# Altium PCB CH565W-R0-1v1.PcbDoc (part 1 of 4)
Units mil, origin at the board's own origin, x right, y up, seen from the top; angles counter-clockwise.
Board outline 3947.04 x 3947.04 mil, 4 copper layers (Top Layer, Layer 1, Layer 2, Bottom Layer), stack 23.756 mil thick; 204 components, 168 nets, 932 pads, 1005 vias.
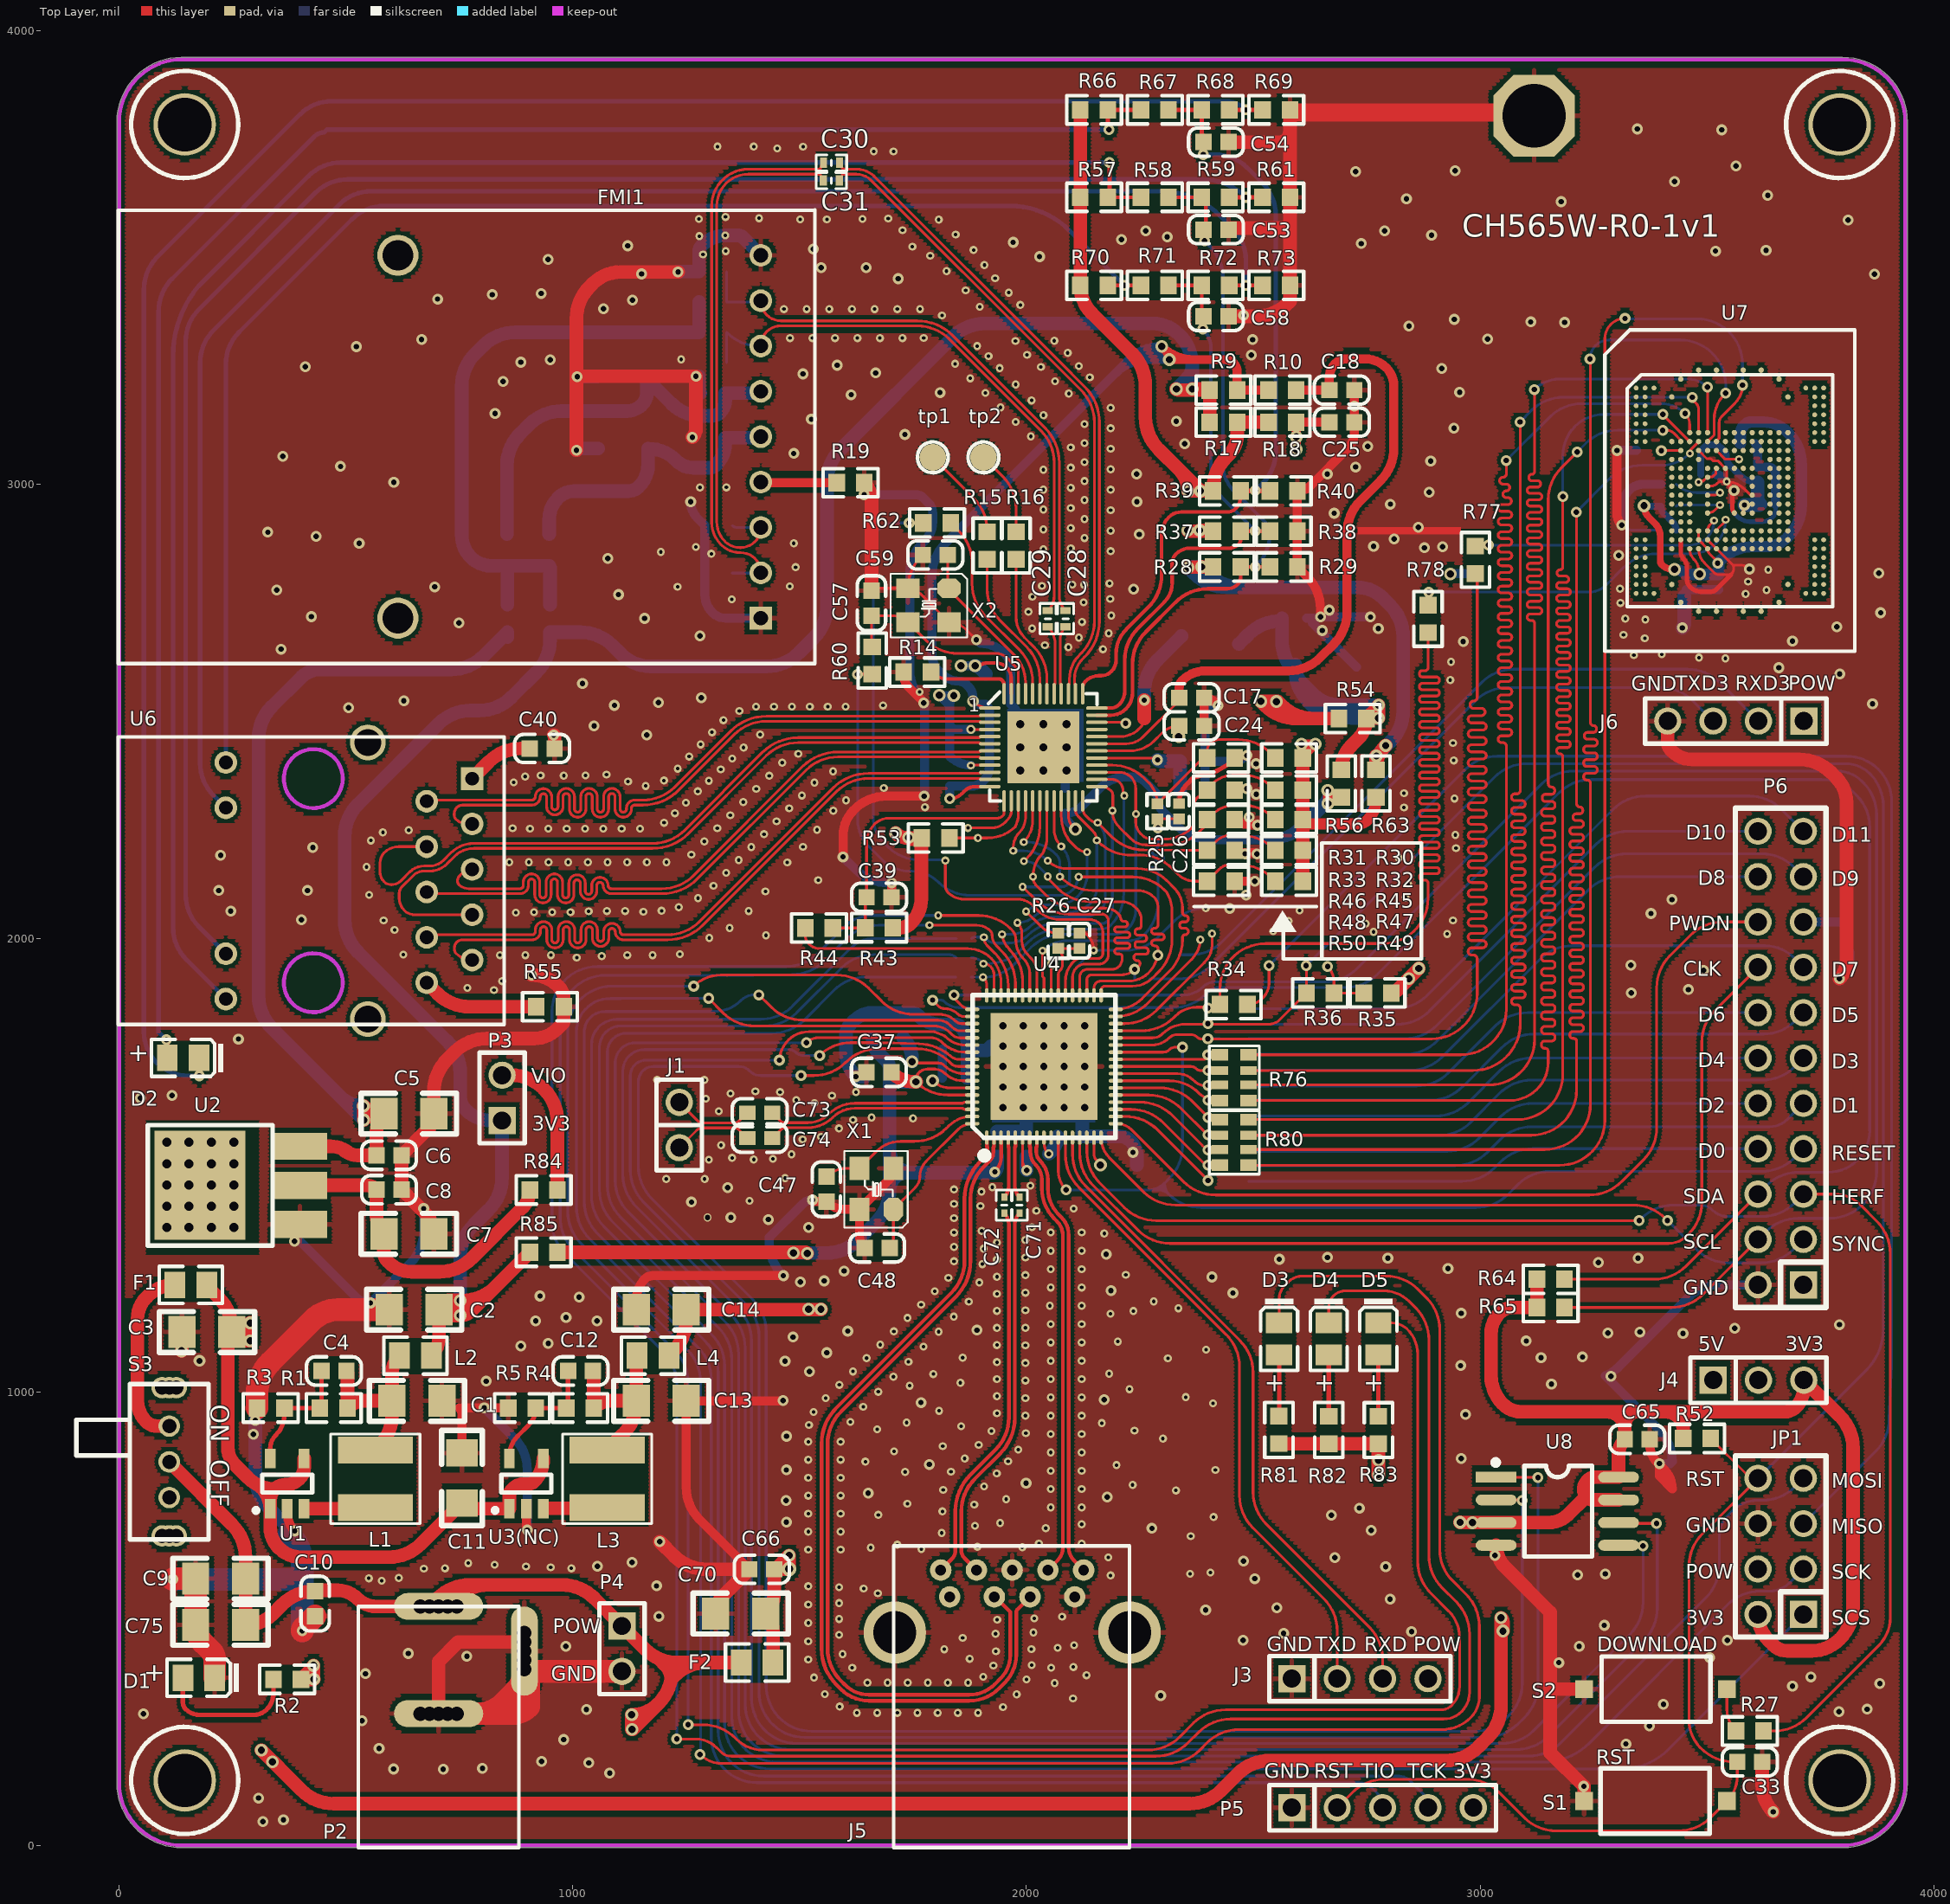
[diagram p0: Top Layer view]
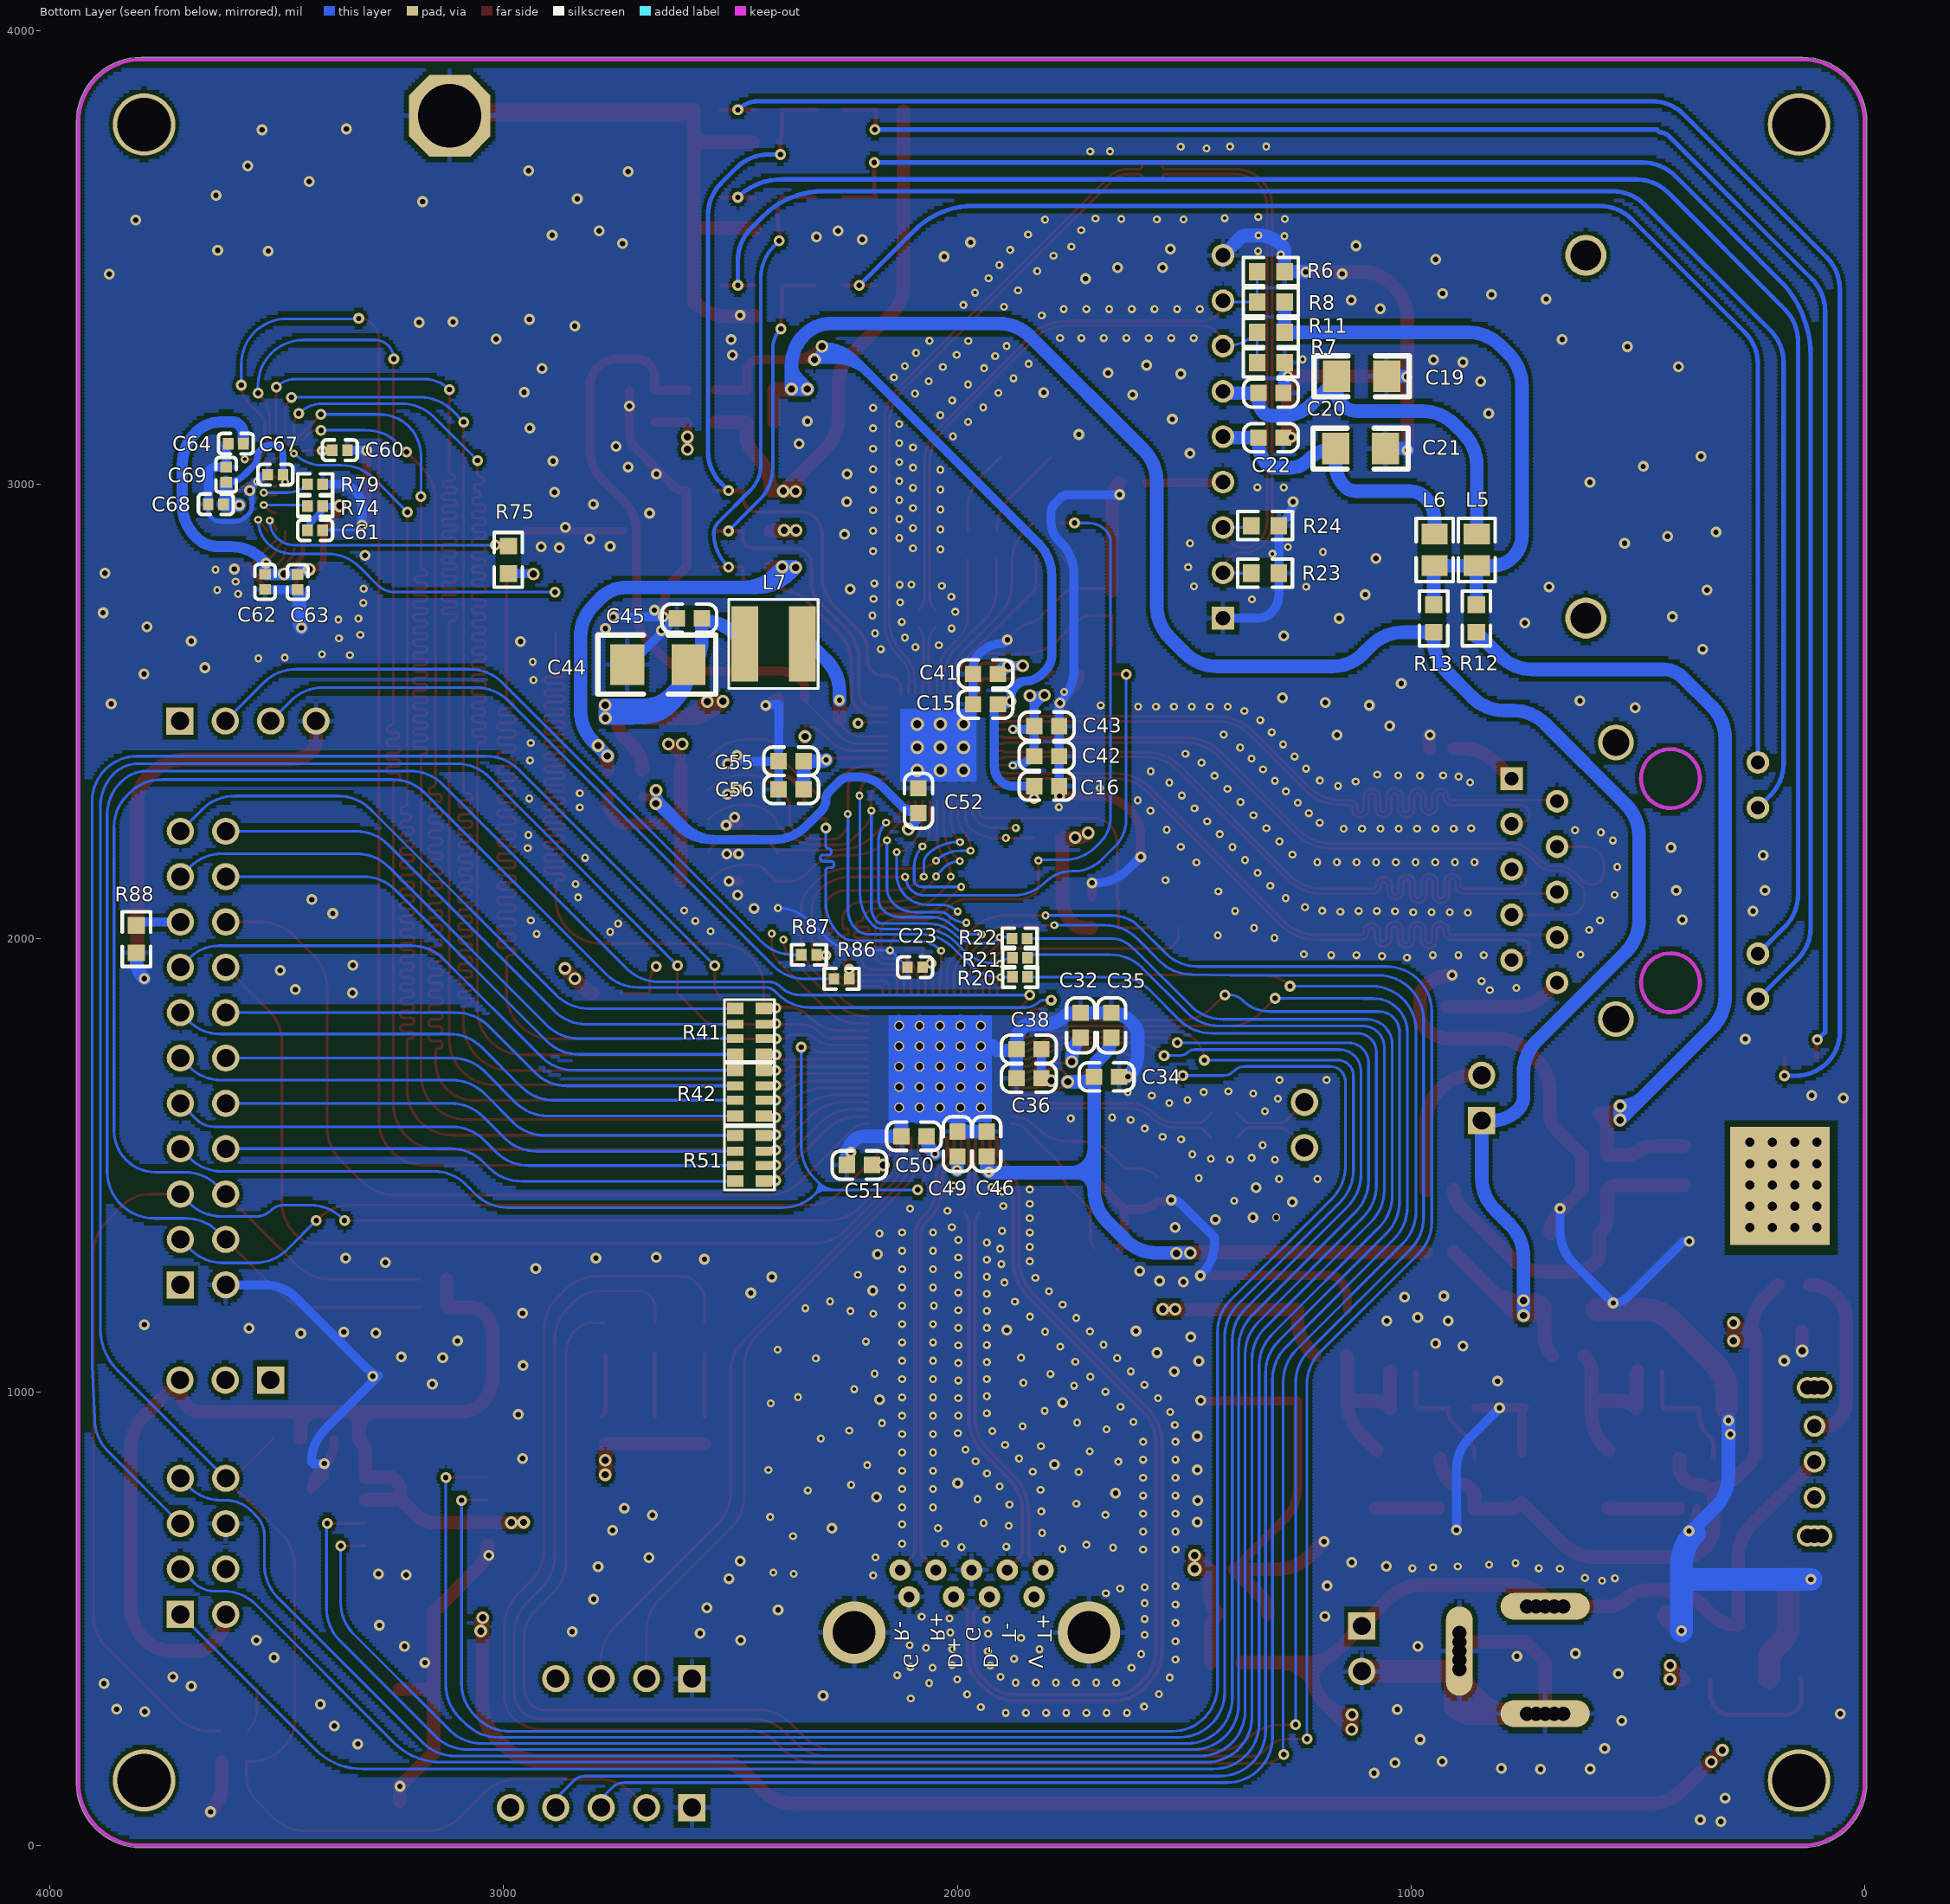
[diagram p1: Bottom Layer view, seen from below]
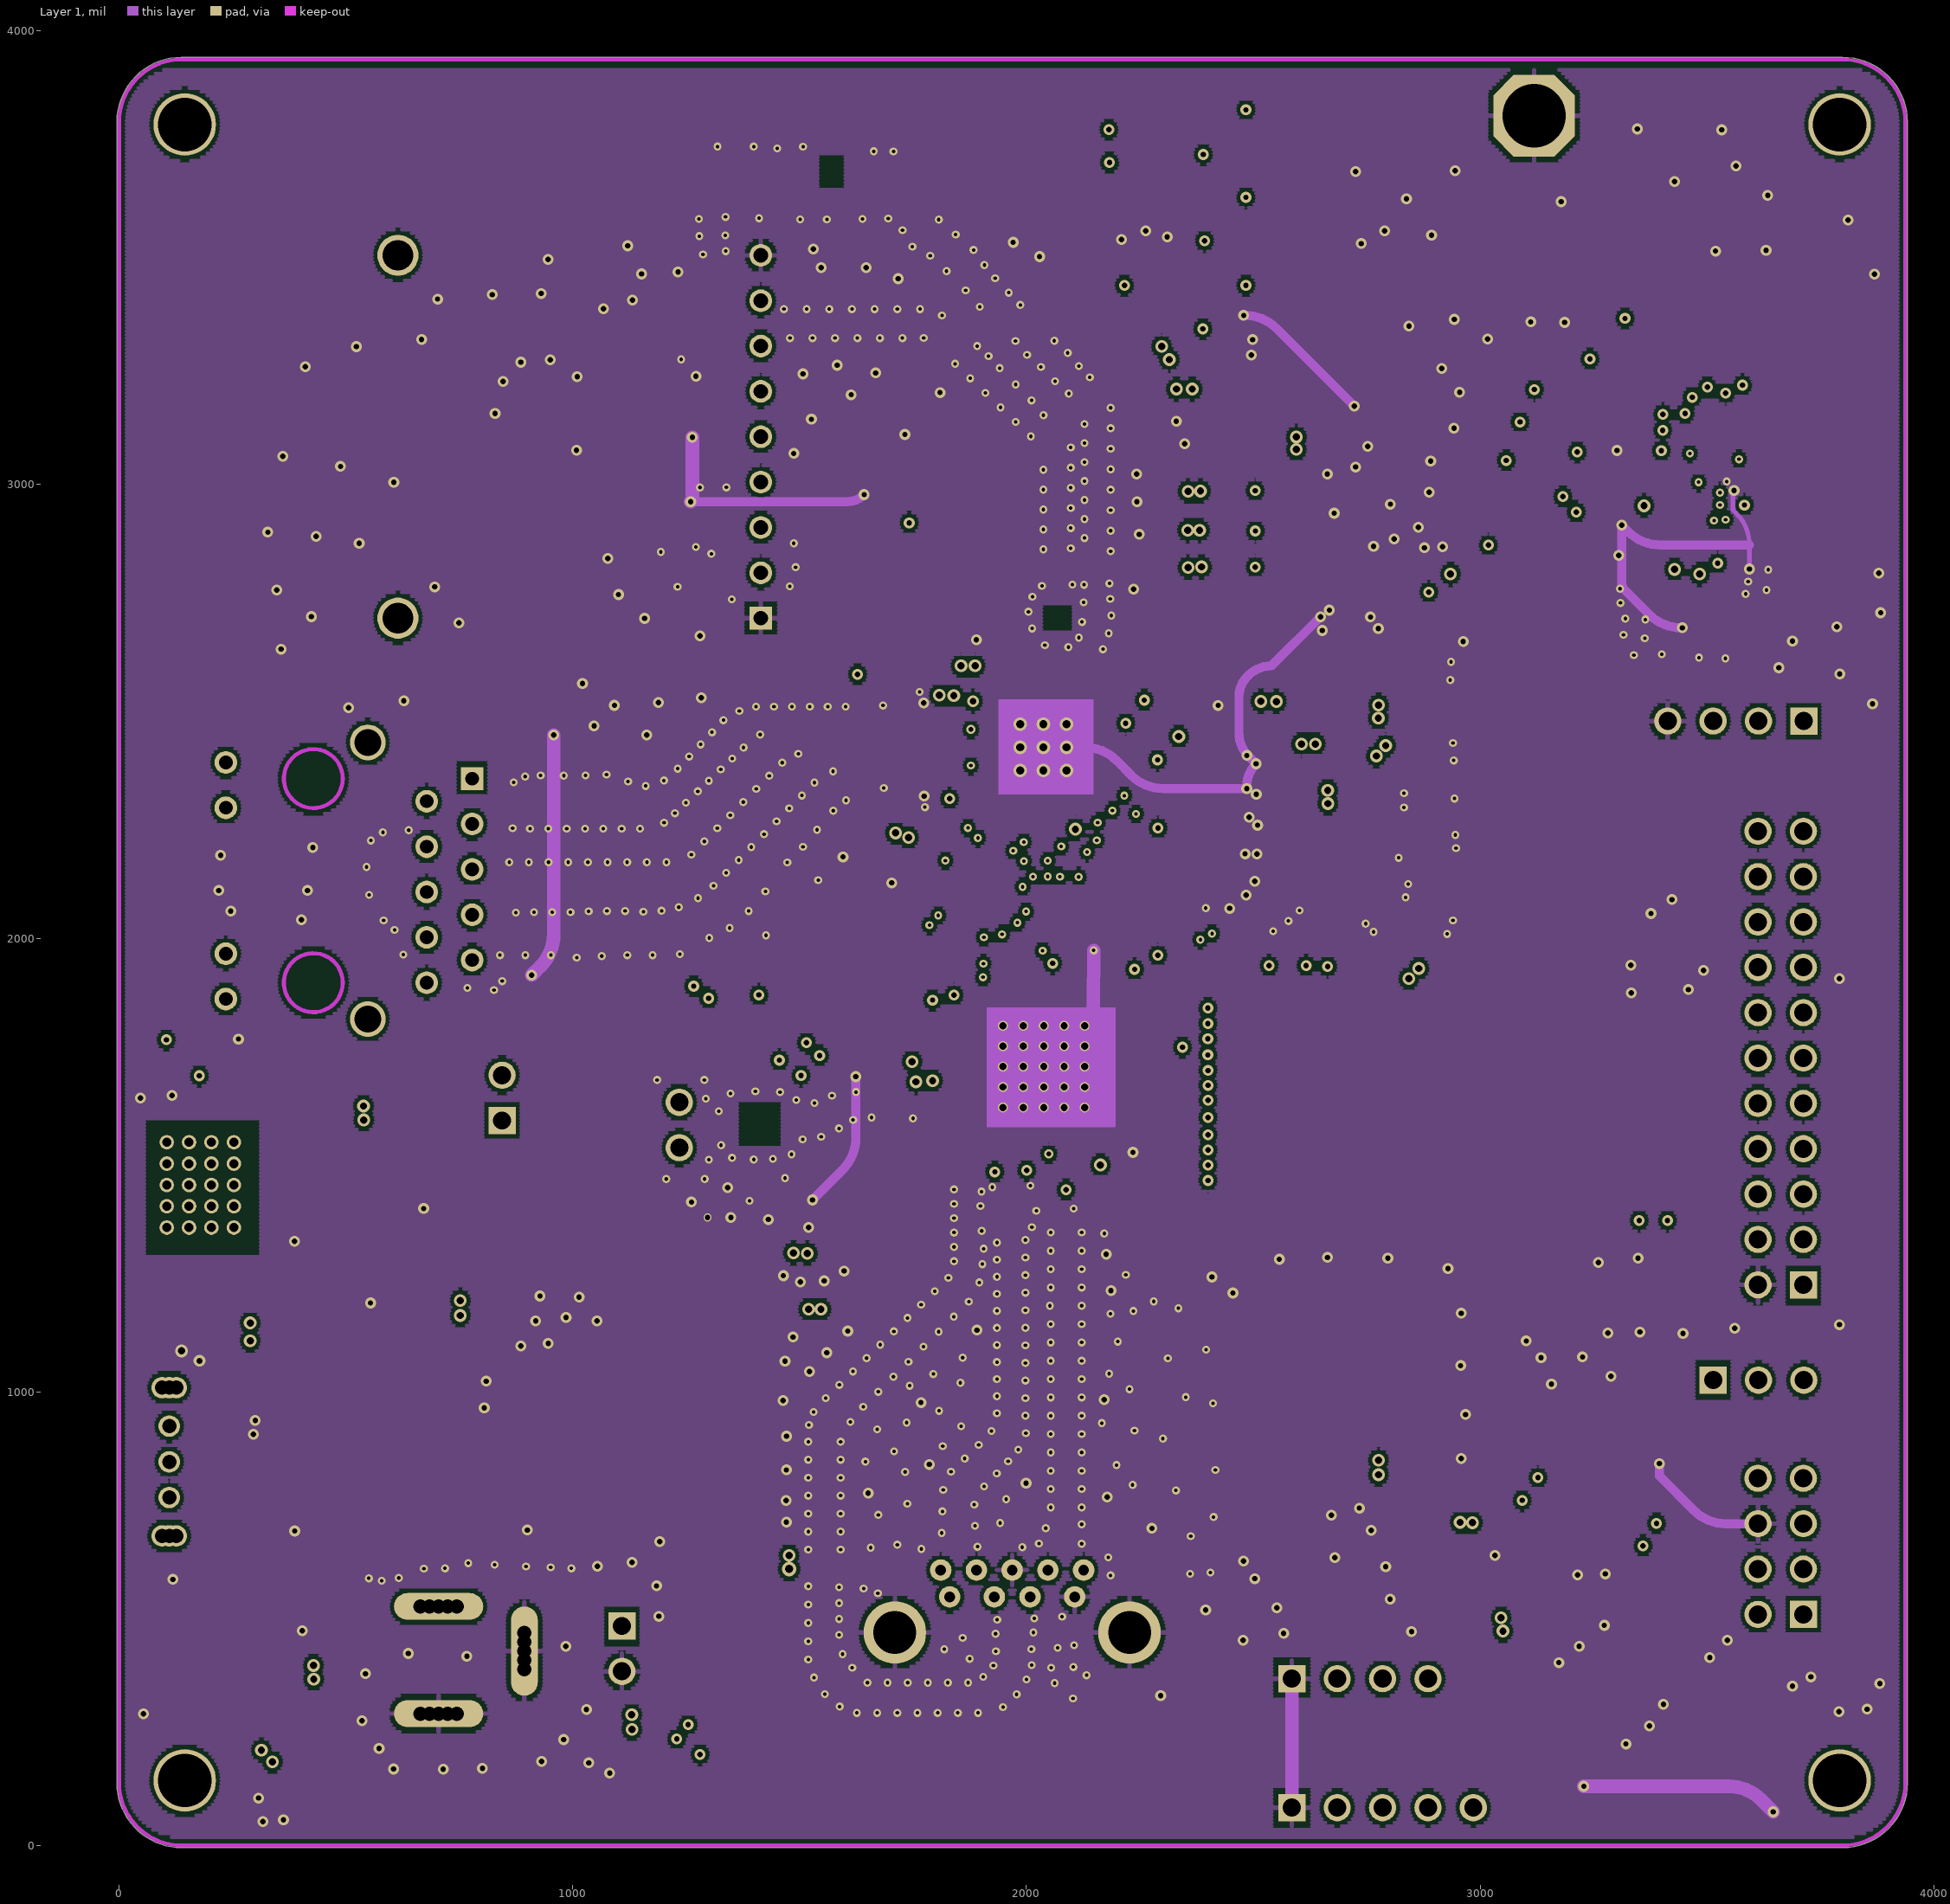
[diagram p2: Layer 1]
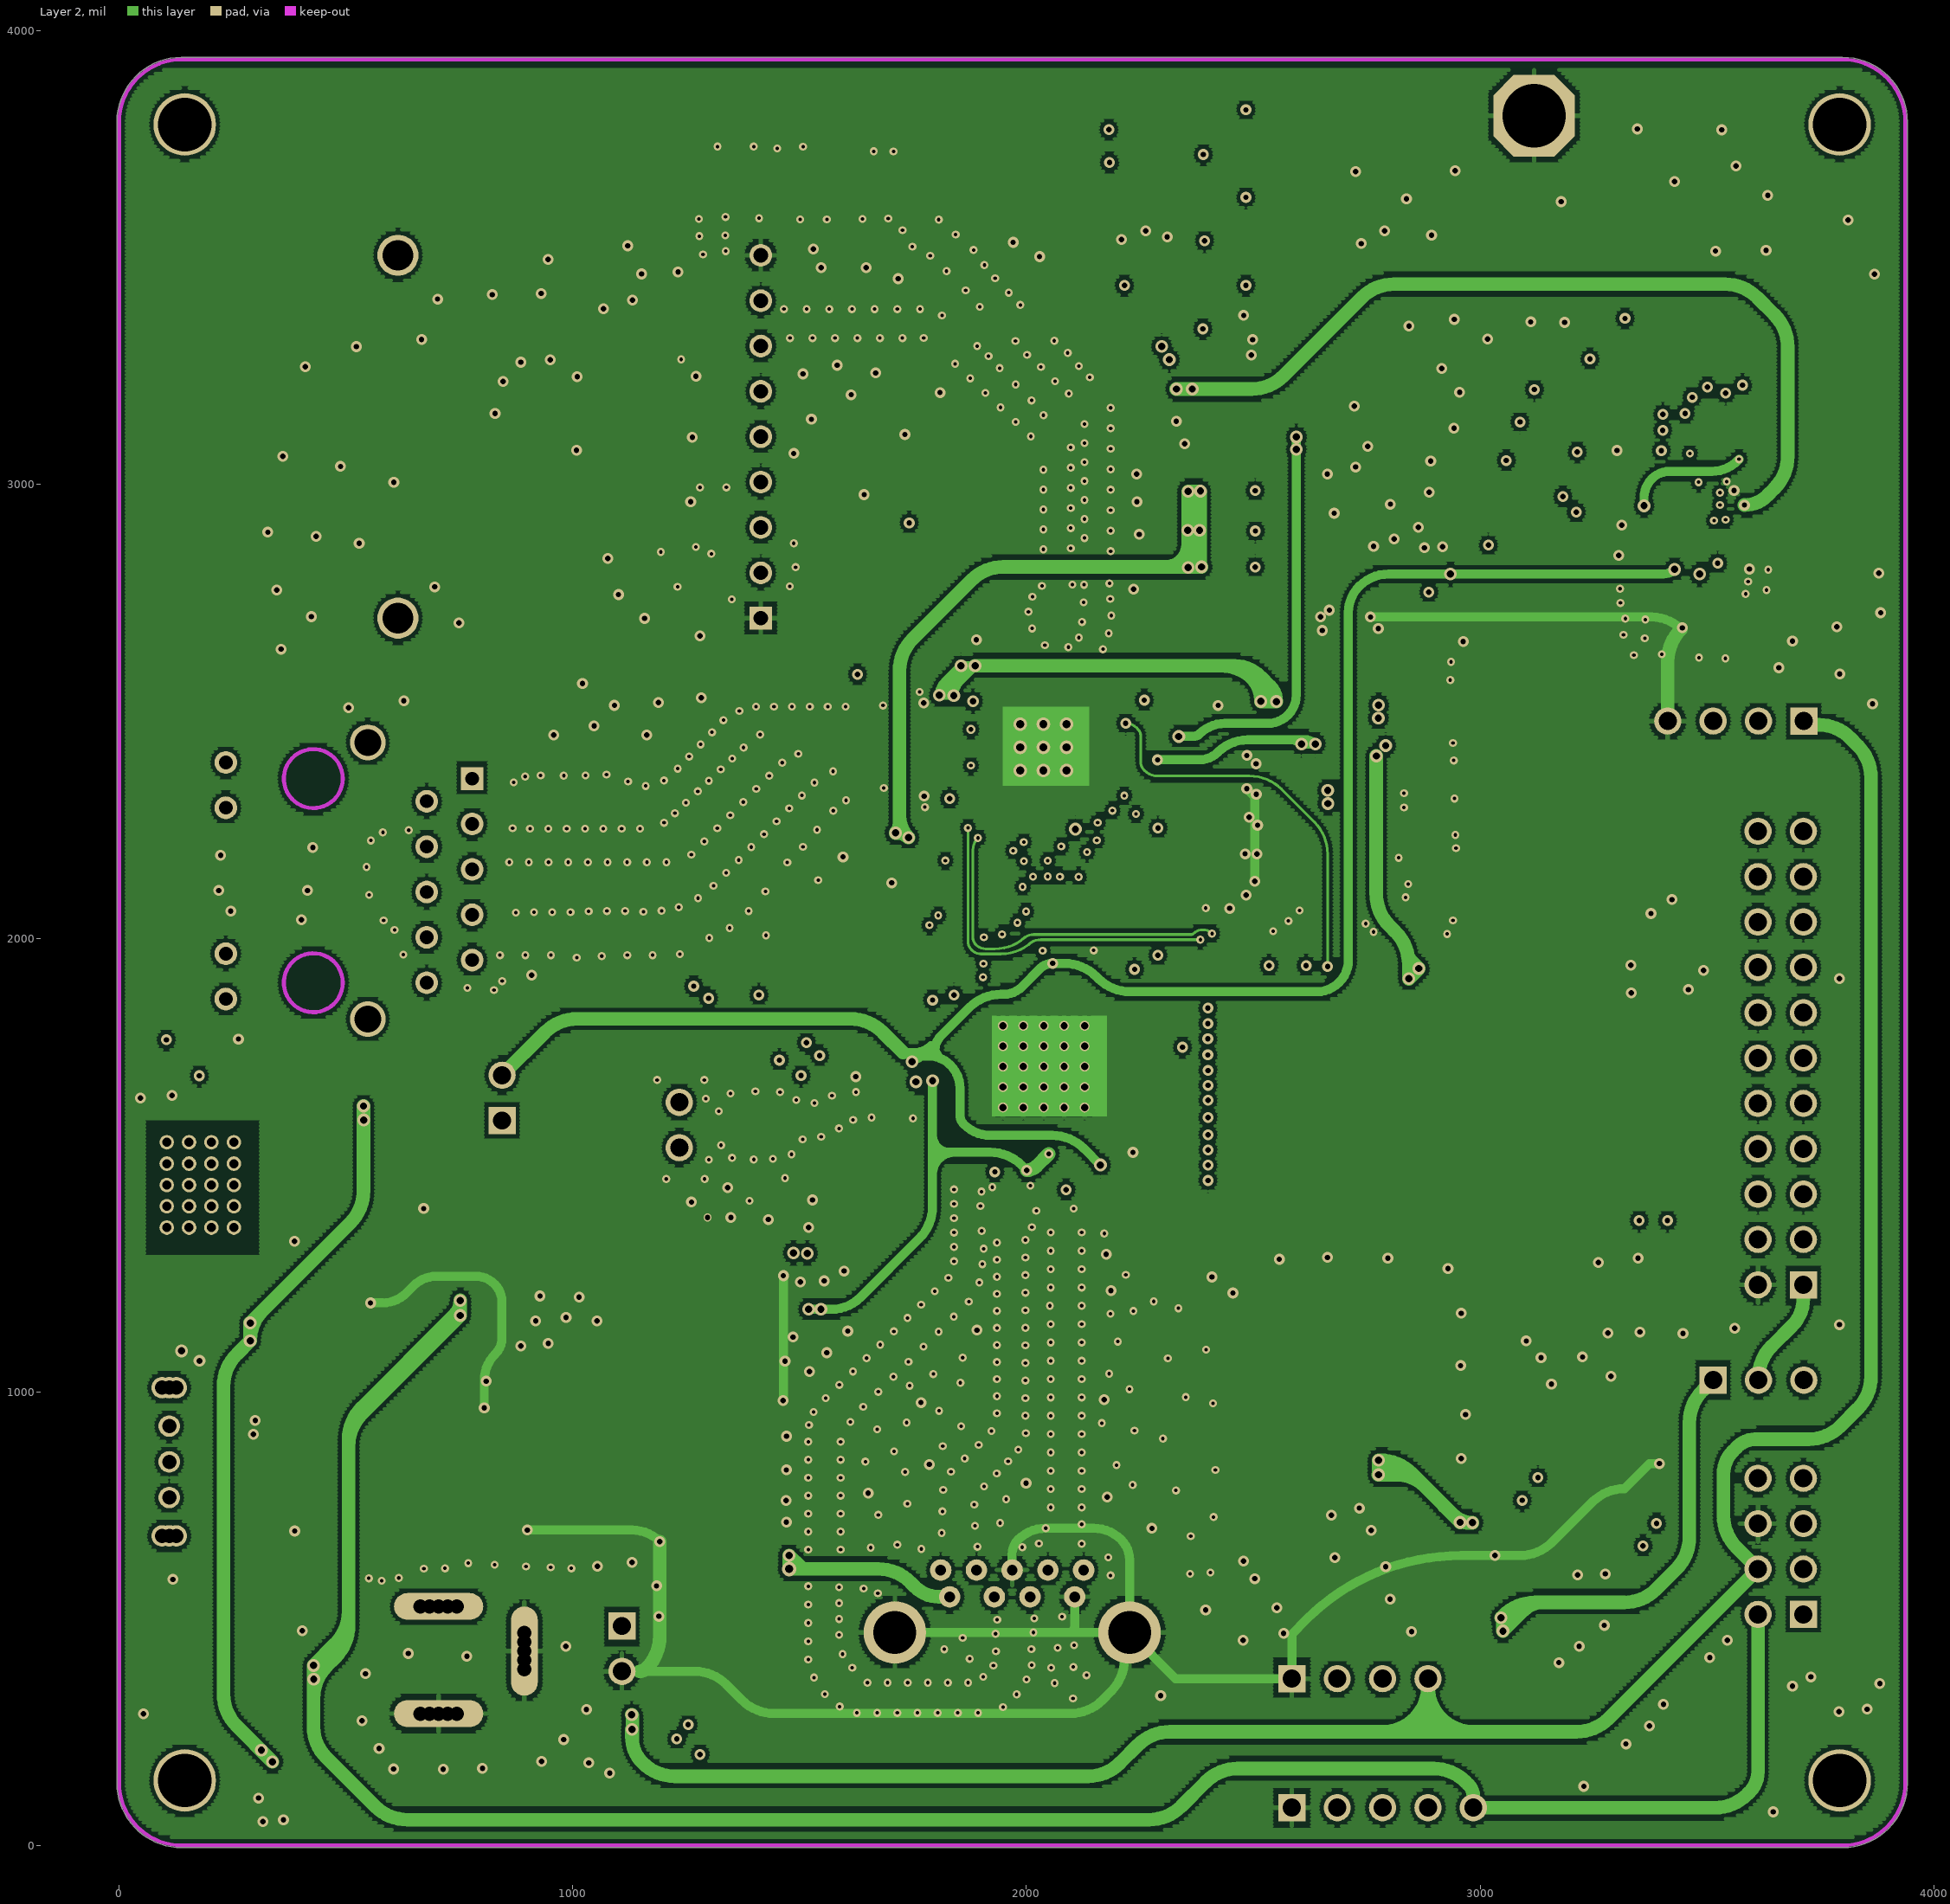
[diagram p3: Layer 2]

## Layer stack, top to bottom
Top Solder: solder mask 0.4, Solder Resist, Dk 3.5
Top Layer: signal copper 1.4
Dielectric 2: prepreg 2.8, PP-006, Dk 4.1
Layer 1: signal copper 1.378
Dielectric 3: prepreg 2.8, PP-006, Dk 4.1
Layer 2: signal copper 1.378
Dielectric 1: dielectric 12.6, FR-4, Dk 4.8
Bottom Layer: signal copper 1.4
Bottom Solder: solder mask 0.4, Solder Resist, Dk 3.5

## Board outline
-5.02,137.56 cw(c0,137.56) -5.01,137.68 cw(c0,137.8) -5.02,137.8 -5.02,3799.21 cw(c0,3799.21) -5.01,3799.38 cw(c0,3799.54) -5.02,3799.55 cw(c137.63,3799.38) 136.8,3942.02 cw(c137.63,3799.38) 136.97,3942.02 cw(c137.63,3799.38) 137.8,3942.02 136.97,3942.02 3799.21,3942.02 cw(c3799.21,3937.01) 3799.28,3942.02 cw(c3799.21,3799.21) 3942.02,3799.27 cw(c3937.01,3799.21) 3942.02,3799.21 3942.02,137.8 cw(c3937.01,137.8) 3942.02,137.74 ccw(c3799.36,137.65) 3942.02,137.8 ccw(c3799.36,137.65) 3942.02,137.8 3942.02,137.74 cw(c3799.36,137.65) 3942.02,137.65 cw(c3799.36,137.65) 3799.51,-5.01 cw(c3799.5,0) 3799.36,-5.01 cw(c3799.21,0) 3799.21,-5.01 137.79,-5.01 137.8,-5.01 cw(c137.68,137.68)

## Design rules (kind name [scope] priority, off if disabled: settings)
Clearance Clearance_2 [InPolygon] p1: gap=8 ignorepadtopadclearanceinfootprint=FALSE
Clearance Clearance_1 [IsVia] p2: gap=5 ignorepadtopadclearanceinfootprint=FALSE
Clearance [All] p3: gap=5 ignorepadtopadclearanceinfootprint=FALSE
ComponentClearance [All] p1 off: gap=10 collisioncheckmode=3 verticalgap=10 showdistances=FALSE
DiffPairsRouting [All] p1: maxlimit=10 minlimit=3.5 mostfreqgap=5 toplayer_minwidth=3.5 toplayer_maxwidth=20 toplayer_prefwidth=15 midlayer1_minwidth=3.5 midlayer1_maxwidth=20 midlayer1_prefwidth=15 midlayer2_minwidth=3.5 midlayer2_maxwidth=20 midlayer2_prefwidth=15 bottomlayer_minwidth=3.5 bottomlayer_maxwidth=20 bottomlayer_prefwidth=15 maxuncoupledlength=500
MinimumSolderMaskSliver [All] p1 off: minsoldermaskwidth=10
PolygonConnect PolygonConnect_1 [IsVia] p1: connectstyle=Direct reliefconductorwidth=10 reliefentries=4 polygonreliefangle="90 Angle" airgapwidth=10
PolygonConnect [All] p2: connectstyle=Relief reliefconductorwidth=10 reliefentries=4 polygonreliefangle="90 Angle" airgapwidth=10
RoutingVias [All] p1: holewidth=12 width=24 viastyle="Through Hole" minholewidth=7.87 minwidth=17.72 maxholewidth=28 maxwidth=50
SilkToSilkClearance [All] p1 off: silktosilkclearance=10
SilkToSolderMaskClearance [IsPad] p1 off: minsilkscreentomaskgap=10 clearancetoexposedcopper=TRUE
SolderMaskExpansion [All] p1: expansion=4 istentingtop=FALSE
Width [All] p1: maxlimit=60 minlimit=3.5 preferedwidth=30
25 further rules are at their usual default settings.

## Classes and differential pairs
differential pair EX: +EX_p -EX_n
differential pair HSI: +HSI_p -HSI_n
differential pair HSO_CK: +HSO_CK_p -HSO_CK_n
differential pair HSO: +HSO_p -HSO_n
differential pair MDI0: +MDI0_p -MDI0_n
differential pair MDI1: +MDI1_p -MDI1_n
differential pair MDI2: +MDI2_p -MDI2_n
differential pair MDI3: +MDI3_p -MDI3_n
differential pair RX: +RX_P -RX_N
differential pair SSRX: +SSRX_p -SSRX_n
differential pair SSTX: +SSTX_p -SSTX_n
differential pair TX: +TX_P -TX_N
differential pair UD: +UD_p -UD_n

## Components (designator, comment, footprint, x,y, rotation, side; value= is the part's Value field where it differs from the comment)
C1 "10uF" 3216 711.33,980.05 r0 top
C2 "10uF" 3216 595.06,1181.08 r180 top
C3 "10uF" 3216 138.32,1131.85 r180 top
C4 "20pF" 0603C#1 445.73,1045.86 r0 top
C5 "10uF" 3216 693.5,1613.32 r0 top
C6 "100nF" 0603C#1 622.28,1521.29 r180 top
C7 "10uF" 3216 693.5,1348.18 r0 top
C8 "100nF" 0603C#1 622.28,1445.69 r180 top
C9 "33uF" 3216 168.31,588.13 r180 top
C10 "100nF" 0603C#1 431.73,505.44 r90 top
C11 "NC(100nF)" 3216 755.6,865.01 r90 top
C12 "NC(20pF)" 0603C#1 989.47,1045.86 r0 top
C13 "NC(10uF)" 3216 1249.85,980.05 r0 top
C14 "NC(10uF)" 3216 1139.85,1181.08 r180 top
C15 "100nF" 0603C#1 1965.29,2515.77 r180 bottom
C16 "100nF" 0603C#1 1775.37,2335.2 r0 bottom
C17 "100nF" 0603C#1 2391.58,2530.02 r180 top
C18 "4.7uF" 0603C#1 2722.62,3208.28 r180 top
C19 "10UF" 3216 1163.53,3238.71 r0 bottom
C20 "104" 0603C#1 1336.16,3201.83 r180 bottom
C21 "10uF" 3216 1166.01,3079.34 r0 bottom
C22 "104" 0603C#1 1336.16,3103.34 r180 bottom
C23 "100nF" 0402C 2076.34,1936.13 r270 bottom
C24 "100nF" 0603C#1 2391.58,2467.96 r180 top
C25 "4.7uF" 0603C#1 2722.62,3137.48 r180 top
C26 "NC" 0402C 2336.45,2296.65 r0 top
C27 "NC" 0402C 2116.58,1977.58 r180 top
C28 "100nF" "C 0402_L"#1 2086.23,2704.42 r90 top
C29 "100nF" "C 0402_L"#1 2047.23,2704.42 r90 top
C30 "100nF" "C 0402_L"#1 1570.12,3709.36 r180 top
C31 "100nF" "C 0402_L"#1 1569.93,3670.39 r180 top
C32 "100nF" 0603C#1 1727.98,1780.45 r90 bottom
C33 "100nF" 0603C#1 3567.1,184.19 r0 top
C34 "100nF" 0603C#1 1698.35,1694.32 r180 bottom
C35 "3.3uF" 0603C#1 1660.22,1835.43 r270 bottom
C36 "100nF" 0603C#1 1869.62,1691.49 r180 bottom
C37 "100nF" 0603C#1 1647.17,1704.14 r0 top
C38 "3.3uF" 0603C#1 1869.62,1755.37 r180 bottom
C39 "100nF" 0603C#1 1702.57,2090.31 r180 top
C40 "100nF" 0603C#1 904.72,2418.14 r0 top
C41 "100nF" 0603C#1 1965.29,2582.46 r180 bottom
C42 "100nF" 0603C#1 1775.37,2401.28 r0 bottom
C43 "100nF" 0603C#1 1775.37,2467.37 r0 bottom
C44 "22uF" 3528 2727.47,2603.15 r0 bottom
C45 "100nF" 0603C#1 2618.17,2705.28 r180 bottom
C46 "100nF" 0603C#1 1935.23,1573.66 r270 bottom
C47 "20pF" 0603C#1 1558.97,1474.18 r270 top
C48 "20pF" 0603C#1 1643.26,1317 r0 top
C49 "100nF" 0603C#1 1999.49,1573.66 r270 bottom
C50 "100nF" 0603C#1 2123.11,1563.26 r180 bottom
C51 "100nF" 0603C#1 2243.18,1499.94 r180 bottom
C52 "100nF" 0603C#1 2085.63,2330.59 r270 bottom
C53 "100nF" 0603C#1 2390.39,3562.09 r0 top
C54 "100nF" 0603C#1 2390.39,3755.1 r0 top
C55 "100nF" 0603C#1 2393.75,2390.13 r180 bottom
C56 "4.7uF" 0603C#1 2393.75,2328.02 r180 bottom
C57 "27pF" 0603C#1 1658.43,2766.06 r270 top
C58 "100nF" 0603C#1 2390.39,3370.91 r0 top
C59 "27pF" 0603C#1 1771.58,2844.91 r0 top
C60 "1uF" 0402C 3377.84,3075.88 r90 bottom
C61 "4.7uF" 0402C 3432.34,2899.46 r90 bottom
C62 "100nF" 0402C 3526.13,2802.36 r180 bottom
C63 "100nF" 0402C 3454.09,2801.85 r180 bottom
C64 "100nF" 0402C 3573.76,3090.21 r270 bottom
C65 "100nF" 0603C#1 3374.03,895.12 r180 top
C66 "100nF" 0603C#1 1444.06,608.6 r180 top
C67 "4.7uF" 0402C 3486.52,3021.86 r270 bottom
C68 "100nF" 0402C 3617.9,2956.7 r270 bottom
C69 "100nF" 0402C 3611.87,3004.9 r0 bottom
C70 "10uF" 3216 1424.93,510.97 r0 top
C71 "100nF" "C 0402_L"#2 1984.51,1411.34 r270 top
C72 "100nF" "C 0402_L"#2 1951.01,1411.34 r270 top
C73 "NC(100nF)" 0603C#2 1439.59,1615.2 r180 top
C74 "NC(100nF)" 0603C#2 1439.59,1559.12 r180 top
C75 "33uF" 3216 168.31,486.14 r180 top
D1 "LED1" 0805+ 140.35,369.48 r0 top
D2 "bule 0805" 0805+ 105.9,1736.01 r0 top
D3 "Green 0805" 0805+ 2557.01,1081.6 r90 top
D4 "Blue 0805" 0805+ 2666.38,1081.6 r90 top
D5 "Yellow 0805" 0805+ 2775.75,1081.6 r90 top
F1 "1A" 0805 122.84,1235.6 r0 top
F2 "1A" 0805 1441.23,402.99 r180 top
FMI1 "PT8351" PT8351 1414.36,2705.51 r180 top
J1 "CON2(NC)" SIP2-2.54mm#1 1234.59,1638.12 r0 top
J3 "CON4" SIP4-2.54mm 2585.09,367.45 r90 top
J4 "CON3" SIP3-2.54mm 3513.66,1025.68 r90 top
J5 "USB-AF3.0" USB3.0-A-Receptacle 1830.72,547.91 r0 top
J6 "CON4" SIP4-2.54mm 3713.66,2478.72 r270 top
JP1 "HEADER 4X2" IDC8-2.54mm 3712.66,509.23 r180 top
L1 "*" SMD_5x5mm 564.59,744.24 r90 top
L2 "1uH" 0805 617.88,1079.72 r0 top
L3 "NC(3.3uH)" SMD_5x5mm 1075.53,744.24 r90 top
L4 "nc(1uH)" 0805 1141.72,1079.72 r0 top
L5 "100mH" 0805 854.63,2821.07 r90 bottom
L6 "100mH" 0805 947.63,2821.07 r90 bottom
L7 "2.2uH" SMD_5x5mm 2341.44,2648.83 r0 bottom
P2 "POWER_JACK" DC-005 704.07,526.67 r90 top
P3 "Header 2" SIP2-2.54mm#2 843.97,1597.92 r0 top
P4 "Header 2" SIP2-2.54mm#2 1108.22,483.63 r180 top
P5 "Header 5" SIP5-2.54mm 2585.09,83.11 r90 top
P6 "Header 11X2" IDC22-2.54mm 3712.66,1235.79 r180 top
R1 "10K" 0603 503.06,964.09 r180 top
R2 "1KΩ" 0603 339.95,365.91 r0 top
R3 "2.2K" 0603 303.6,964.09 r0 top
R4 "NC(10KΩ)" 0603 1046.15,964.09 r180 top
R5 "NC(10KΩ)" 0603 857.74,964.09 r0 top
R6 "NC(180Ω)" 0603 1338.98,3469.48 r180 bottom
R7 "NC(180Ω)" 0603 1338.98,3268.74 r180 bottom
R8 "NC(68Ω)" 0603 1338.98,3402.57 r180 bottom
R9 "0Ω" 0603 2403.9,3208.28 r0 top
R10 "0Ω" 0603 2533.95,3208.28 r0 top
R11 "NC(68Ω)" 0603 1338.98,3335.66 r180 bottom
R12 "NC(0Ω)" 0603 855.52,2674.67 r90 bottom
R13 "0Ω" 0603 949.8,2674.67 r90 bottom
R14 "2.49KΩ 1%." 0603 1789.55,2586.75 r180 top
R15 "NC(0Ω)" 0603 1913.28,2895.75 r270 top
R16 "NC(0Ω)" 0603 1977.14,2895.75 r270 top
R17 "0Ω" 0603 2403.9,3137.48 r0 top
R18 "0Ω" 0603 2533.95,3137.48 r0 top
R19 "4.7KΩ" 0603 1642.47,3004.25 r180 top
R20 "NC(0R)" 0402 1878.26,1914.38 r180 bottom
R21 "NC(0R)" 0402 1878.52,1957.02 r180 bottom
R22 "NC(0R)" 0402 1879.11,1999.15 r180 bottom
R23 "NC(270Ω)" 0603 1291.18,2804.76 r0 bottom
R24 "NC(270Ω)" 0603 1291.18,2909.48 r0 bottom
R25 "0Ω" 0402 2288.5,2263.11 r90 top
R26 "0Ω" 0402 2070.34,2010.74 r270 top
R27 "0Ω" 0603 3624.9,252.09 r180 top
R28 "4.7KΩ" 0603 2411.47,2818.39 r0 top
R29 "NC" 0603 2536.59,2818.39 r0 top
R30 "NC" 0603 2609.22,2397.59 r180 top
R31 "4.7KΩ" 0603 2398.43,2397.59 r0 top
R32 "NC" 0603 2609.22,2326.58 r180 top
R33 "4.7KΩ" 0603 2398.43,2326.58 r0 top
R34 "0Ω" 0603 2426.43,1853.87 r0 top
R35 "4.7K" 0603 2743.57,1879.13 r0 top
R36 "0Ω" 0603 2677.86,1879.13 r180 top
R37 "NC" 0603 2411.47,2897.13 r0 top
R38 "4.7KΩ" 0603 2536.59,2897.13 r0 top
R39 "NC" 0603 2411.47,2985.87 r0 top
R40 "4.7KΩ" 0603 2536.59,2985.87 r0 top
R41 "33R" RCA-8P4R-0603 2458.02,1794.33 r270 bottom
R42 "33R" RCA-8P4R-0603 2458.02,1658.42 r90 bottom
R43 "4.7K" 0603 1644.77,2023.17 r0 top
R44 "0Ω" 0603 1573.01,2022.43 r180 top
R45 "NC" 0603 2609.22,2261.58 r180 top
R46 "4.7KΩ" 0603 2398.43,2261.58 r0 top
R47 "NC" 0603 2609.22,2193.57 r180 top
R48 "4.7KΩ" 0603 2398.43,2193.57 r0 top
R49 "NC" 0603 2609.22,2125.57 r180 top
R50 "4.7KΩ" 0603 2398.43,2125.57 r0 top
R51 "33R" RCA-8P4R-0603 2458.02,1514.59 r90 bottom
R52 "10KΩ" 0603 3508.47,897.08 r180 top
R53 "4.7K" 0603 1769.44,2220.81 r0 top
R54 "0Ω" 0603 2749.47,2484.02 r180 top
R55 "0Ω" 0603 919.3,1848.76 r0 top
R56 "0Ω" 0603 2694.06,2371.24 r270 top
R57 "510Ω" 0603 2118.6,3633.33 r0 top
R58 "NC" 0603 2252.54,3633.33 r0 top
R59 "0Ω" 0603 2447.11,3633.33 r180 top
R60 "0Ω" 0603 1659.93,2642.4 r270 top
R61 "NC" 0603 2520.42,3633.33 r0 top
R62 "0Ω" 0603 1833.08,2915.44 r180 top
R63 "0Ω" 0603 2770.33,2310.61 r90 top
R64 "10K" 0603 3185.89,1248.07 r180 top
R65 "10K" 0603 3185.89,1185.93 r180 top
R66 "NC(510Ω)" 0603 2118.6,3826.22 r0 top
R67 "0Ω" 0603 2252.54,3826.22 r0 top
R68 "NC" 0603 2447.11,3826.22 r180 top
R69 "510Ω" 0603 2520.42,3826.22 r0 top
R70 "NC" 0603 2118.6,3439.1 r0 top
R71 "0Ω" 0603 2252.54,3439.1 r0 top
R72 "NC" 0603 2447.11,3439.1 r180 top
R73 "510Ω" 0603 2520.42,3439.1 r0 top
R74 "33" 0402 3398.87,2952.28 r0 bottom
R75 "10K" 0603 2989.6,2803.67 r90 bottom
R76 "33R" RCA-8P4R-0603 2458.02,1692.43 r270 top
R77 "33" 0603 2989.6,2864.3 r270 top
R78 "33" 0603 2885.32,2734.3 r270 top
R79 "1K" 0402 3432.34,3000.83 r180 bottom
R80 "33R" RCA-8P4R-0603 2458.02,1549.7 r270 top
R81 "1KΩ" 0603 2556.38,946.26 r270 top
R82 "1KΩ" 0603 2666.38,946.08 r270 top
R83 "1KΩ" 0603 2775.75,945.83 r270 top
R84 "0Ω" 0603 905.3,1445.02 r0 top
R85 "0" 0603 905.3,1307.5 r0 top
R86 "NC" 0402 2271.88,1910.43 r180 bottom
R87 "NC" 0402 2343.67,1963.28 r180 bottom
R88 "NC(0Ω)" 0603 3809.64,1967.68 r90 bottom
S1 "SW-PB" SMD_6.1x3.65x2.5mm-KEY 3544.26,97.75 r180 top
S2 "SW-PB" SMD_6.1x3.65x2.5mm-KEY 3229.3,344.38 r0 top
S3 "SW-SPDT" "Horizontal Slide Switch_8.7x4.4mm-2D" 23.56,1016.84 r270 top
tp1 "test-point" TESTPOINT1 1793.44,3060.12 r0 top
tp2 "test-point" TESTPOINT1 1905.1,3060.12 r0 top
U1 "8502AM" SOT-23-5 332.87,742.39 r0 top
U2 "1117-3.3V" SOT-223 398.07,1369.16 r90 top
U3(NC) "8502AM" SOT-23-5 860,742.39 r0 top
U4 "CH565W" QFN68_8X8 2038.59,1717.12 r0 top
U5 "RTL8211FS" QFN48_6X6 1919.13,2507.41 r0 top
U6 "HR911130C" HR911130C 777.86,2351.78 r90 top
U7 "MTFC16GJVEC-4M IT" WFBGA-169-14x18x0.8mm 3422.73,3114.53 r0 top
U8 "W25Q32JV" SOIC-8_208mil 3035.36,811.58 r0 top
X1 "30MHz" 3225 1631.8,1402.13 r90 top
X2 "25MHz" 3225 1829.29,2696.56 r180 top

## Footprints (in the part's own frame and the unit in brackets; to place one, negate y for a bottom-side part, rotate by r counter-clockwise, add the part's x,y. Pads: shape width x height; smd on the part's side, far side on the other; paste and mask are expansions set on the pad)
0402 [mm]
  rect 0.6x0.65 smd mask+0.051: 1(0,0) 2(0.85,0)
  silkscreen extent -0.55,-0.58 1.4,0.57
0402C [mm]
  rect 0.65x0.6 smd mask+0.051: 1(0,0) 2(0,-0.85)
  silkscreen extent -0.58,-1.4 0.57,0.55
0603 [mm]
  rect 0.93x0.98 smd: 1(0,0) 2(1.54,0)
  silkscreen extent -0.76,-0.79 2.3,0.79
0603C#1 [mil]
  rect 36x36 smd: 1(0,0) 2(55,0)
  silkscreen extent -33,-31 88,31
0603C#2 [mil]
  rect 36x31.08 smd: 1(0,0) 2(55,0)
  silkscreen extent -33,-31 88,31
0805 [mm]
  rect 1.16x1.47 smd: 1(0,0) 2(1.78,0)
  silkscreen extent -0.88,-1.04 2.66,1.03
0805+ [mm]
  rect 1.16x1.47 smd: 1(0,0) 2(1.78,0)
  silkscreen extent -0.88,-1.04 3.13,1.03
3216 [mil]
  rect 60x70 smd: 1(0,0) 2(-110,0)
  silkscreen extent -160,-45 50,45
3225 [mm]
  oct 1.3x1.1 smd: 1(0,-1.9)
  rect 1.3x1.1 smd: 2(2.3,-1.9) 3(2.3,0) 4(0,0)
  silkscreen extent -1.02,-2.7 3.27,0.84
3528 [mil]
  rect 75x90 smd: 1(0,0) 2(-135,0)
  silkscreen extent -195,-65 65,65
"C 0402_L"#1 [mm]
  rect 0.4x0.584 smd: 1(-0.45,0) 2(0.45,0)
  silkscreen extent -0.85,-0.45 0.85,0.45, body extent -0.5,-0.26 0.5,0.26, height 0.53
"C 0402_L"#2 [mm]
  rect 0.4x0.343 smd: 1(-0.45,0) 2(0.45,0)
  silkscreen extent -0.85,-0.45 0.85,0.45, body extent -0.5,-0.26 0.5,0.26, height 0.53
DC-005 [mm]
  round 1 hole 0.8: 1(0,1.016) 1(0,0.508) 1(0,-0.508) 1(0,-1.016) 2(-6,-1.016) 2(-6,-0.508) 2(-6,0.508) 2(-6,1.016) 3(-3.516,-4.8) 3(-3.008,-4.8) 3(-1.992,-4.8) 3(-1.484,-4.8)
  oval 1.5x5 hole 0.8: 1(0,0) 2(-6,0)
  oval 5x1.5 hole 0.8: 3(-2.5,-4.8)
  silkscreen extent -13.5,-4.5 0,4.5
"Horizontal Slide Switch_8.7x4.4mm-2D" [mm]
  round 1.2 hole 0.8: 0(0.2,2.6) 0(0.2,2.2) 0(0.2,1.8) 0(8.5,1.8) 0(8.5,2.2) 0(8.5,2.6) 1(4.35,2.2) 2(2.35,2.2) 3(6.35,2.2)
  silkscreen extent 0,-3 8.7,4.4
HR911130C [mil]
  round 78.74 hole 59.06: 0(-529.99,229.92) 0(79.85,229.92)
  rect 50x50 hole 30: 1(0,0)
  round 50 hole 30: 2(-50,100) 3(-100,0) 4(-150,100) 5(-200,0) 6(-250,100) 7(-300,0) 8(-350,100) 9(-400,0) 10(-450,100) 11(35.76,542.91) 12(-64.24,542.91) 13(-385.9,542.91) 14(-485.9,542.91)
  Keep-Out Layer circle w9: c0,350 r65
  Keep-Out Layer circle w9: c-450,350 r65
  silkscreen extent -542,-70 92,780
IDC8-2.54mm [mil]
  rect 60x60 hole 40: 1(0,0)
  round 60 hole 40: 2(100,0) 3(0,-100) 4(100,-100) 5(0,-200) 6(100,-200) 7(0,-300) 8(100,-300)
  silkscreen extent -50,-350 150,50
IDC22-2.54mm [mil]
  rect 60x60 hole 40: 1(0,0)
  round 60 hole 40: 2(100,0) 3(0,-100) 4(100,-100) 5(0,-200) 6(100,-200) 7(0,-300) 8(100,-300) 9(0,-400) 10(100,-400) 11(0,-500) 12(100,-500) 13(0,-600) 14(100,-600) 15(0,-700) 16(100,-700) 17(0,-800) 18(100,-800) 19(0,-900) 20(100,-900) 21(0,-1000) 22(100,-1000)
  silkscreen extent -50,-1051 150,50
PT8351 [mil] "1.25GHz,1550nm激?"
  rect 50x50 hole 32: 1(0,0)
  round 50 hole 32: 2(0,-100) 3(0,-200) 4(0,-300) 5(0,-400) 6(0,-500) 7(0,-600) 8(0,-700) 9(0,-800)
  round 90.55 hole 66.93: 10(800,0) 11(800,-800)
  silkscreen extent -119,-900 1416,100
QFN48_6X6 [mm]
  oval 1.2x0.2 smd: 1(0,0) 2(0,-0.4) 3(0,-0.8) 4(0,-1.2) 5(0,-1.6) 6(0,-2) 7(0,-2.4) 8(0,-2.8) 9(0,-3.2) 10(0,-3.6) 11(0,-4) 12(0,-4.4) 25(6,-4.4) 26(6,-4) 27(6,-3.6) 28(6,-3.2) 29(6,-2.8) 30(6,-2.4) 31(6,-2) 32(6,-1.6) 33(6,-1.2) 34(6,-0.8) 35(6,-0.4) 36(6,0)
  oval 0.2x1.2 smd: 13(0.8,-5.2) 14(1.2,-5.2) 15(1.6,-5.2) 16(2,-5.2) 17(2.4,-5.2) 18(2.8,-5.2) 19(3.2,-5.2) 20(3.6,-5.2) 21(4,-5.2) 22(4.4,-5.2) 23(4.8,-5.2) 24(5.2,-5.2) 37(5.2,0.8) 38(4.8,0.8) 39(4.4,0.8) 40(4,0.8) 41(3.6,0.8) 42(3.2,0.8) 43(2.8,0.8) 44(2.4,0.8) 45(2,0.8) 46(1.6,0.8) 47(1.2,0.8) 48(0.8,0.8)
  round 0.762 hole 0.457: 49(1.7,-3.5) 49(1.7,-2.2) 49(1.7,-0.9) 49(3,-3.5) 49(3,-2.2) 49(3,-0.9) 49(4.3,-3.5) 49(4.3,-2.2) 49(4.3,-0.9)
  rect 4x4 smd: 49(3,-2.2)
  silkscreen extent -0.08,-5.2 6,0.89
QFN68_8X8 [mm]
  round 0.559 hole 0.406: 0(-2.299,-2.293) 0(-2.299,-1.149) 0(-2.299,-0.006) 0(-2.299,1.138) 0(-2.299,2.281) 0(-1.155,-2.293) 0(-1.155,-1.149) 0(-1.155,-0.006) 0(-1.155,1.138) 0(-1.155,2.281) 0(-0.012,-2.293) 0(-0.012,-1.149) 0(-0.012,-0.006) 0(-0.012,1.138) 0(-0.012,2.281) 0(1.132,-2.293) 0(1.132,-1.149) 0(1.132,-0.006) 0(1.132,1.138) 0(1.132,2.281) 0(2.275,-2.293) 0(2.275,-1.149) 0(2.275,-0.006) 0(2.275,1.138) 0(2.275,2.281)
  rect 6x6 smd: 0(0,0)
  oval 0.2x0.8 smd: 1(-3.2,-3.982) 2(-2.8,-3.982) 3(-2.4,-3.982) 4(-2,-3.982) 5(-1.6,-3.982) 6(-1.2,-3.982) 7(-0.8,-3.982) 8(-0.4,-3.982) 9(0,-3.982) 10(0.4,-3.982) 11(0.8,-3.982) 12(1.2,-3.982) 13(1.6,-3.982) 14(2,-3.982) 15(2.4,-3.982) 16(2.8,-3.982) 17(3.2,-3.982) 35(3.2,3.982) 36(2.8,3.982) 37(2.4,3.982) 38(2,3.982) 39(1.6,3.982) 40(1.2,3.982) 41(0.8,3.982) 42(0.4,3.982) 43(0,3.982) 44(-0.4,3.982) 45(-0.8,3.982) 46(-1.2,3.982) 47(-1.6,3.982) 48(-2,3.982) 49(-2.4,3.982) 50(-2.8,3.982) 51(-3.2,3.982)
  oval 0.8x0.2 smd: 18(4.018,-3.2) 19(4.018,-2.8) 20(4.018,-2.4) 21(4.018,-2) 22(4.018,-1.6) 23(4.018,-1.2) 24(4.018,-0.8) 25(4.018,-0.4) 26(4.018,0) 27(4.018,0.4) 28(4.018,0.8) 29(4.018,1.2) 30(4.018,1.6) 31(4.018,2) 32(4.018,2.4) 33(4.018,2.8) 34(4.018,3.2) 52(-4.018,3.2) 53(-4.018,2.8) 54(-4.018,2.4) 55(-4.018,2) 56(-4.018,1.6) 57(-4.018,1.2) 58(-4.018,0.8) 59(-4.018,0.4) 60(-4.018,0) 61(-4.018,-0.4) 62(-4.018,-0.8) 63(-4.018,-1.2) 64(-4.018,-1.6) 65(-4.018,-2) 66(-4.018,-2.4) 67(-4.018,-2.8) 68(-4.018,-3.2)
  silkscreen extent -4,-5.19 4,4
RCA-8P4R-0603 [mm]
  rect 0.65x0.9 smd: 1(-1.28,-0.8) 4(1.28,-0.8) 5(1.28,0.8) 8(-1.28,0.8)
  rect 0.5x0.9 smd: 2(-0.4,-0.8) 3(0.4,-0.8) 6(0.4,0.8) 7(-0.4,0.8)
  silkscreen extent -1.78,-1.4 1.78,1.4, body extent -1.6,-0.8 1.6,0.8, height 0.6
SIP2-2.54mm#1 [mil]
  round 60 hole 40: 1(0,0) 2(0,-100)
  silkscreen extent -50,-150 50,50
SIP2-2.54mm#2 [mil]
  rect 60x60 hole 40: 1(0,0)
  round 60 hole 40: 2(0,100)
  silkscreen extent -50,-50 50,150
SIP3-2.54mm [mil]
  rect 60x60 hole 40: 1(0,0)
  round 60 hole 40: 2(0,-100) 3(0,-200)
  silkscreen extent -50,-250 50,50
SIP4-2.54mm [mil]
  rect 60x60 hole 40: 1(0,0)
  round 60 hole 40: 2(0,-100) 3(0,-200) 4(0,-300)
  silkscreen extent -50,-350 50,50
SIP5-2.54mm [mil]
  rect 60x60 hole 40: 1(0,0)
  round 60 hole 40: 2(0,-100) 3(0,-200) 4(0,-300) 5(0,-400)
  silkscreen extent -50,-450 50,50
SMD_5x5mm [mm]
  rect 1.5x4.2 smd: 1(0,0) 2(3.23,0)
  silkscreen extent -0.88,-2.5 4.12,2.5
SMD_6.1x3.65x2.5mm-KEY [mm]
  rect 1x1 smd: 1(0,0) 2(8,0)
  silkscreen extent 0.98,-1.83 7.08,1.83
SOIC-8_208mil [mil]
  rect 90x24 smd: 1(0,0)
  oval 90x24 smd: 2(0,-50) 3(0,-100) 4(0,-150) 5(270,-150) 6(270,-100) 7(270,-50) 8(270,0)
  silkscreen extent -7,-175 212,38
SOT-23-5 [mm]
  rect 0.6x1.1 smd: 1(0,0) 2(0.95,0) 3(1.9,0) 4(1.9,2.8) 5(0,2.8)
  silkscreen extent -0.92,-0.22 2.35,1.9
SOT-223 [mil]
  rect 60x120 smd: 1(0,0) 2(86,0) 3(172,0)
  rect 240x200 smd: ""(86,220)
  silkscreen extent -47,60 219,335
TESTPOINT1 [mm]
  round 1.5 smd: 1(0,0)
  silkscreen extent -0.86,-0.86 0.87,0.86
USB3.0-A-Receptacle [mm]
  round 3.5 hole 2.4: 0(-3.07,-2) 0(10.07,-2)
  round 1.2 hole 0.6: 1(0,0) 2(2.5,0) 3(4.5,0) 4(7,0) 5(7.5,1.5) 6(5.5,1.5) 7(3.5,1.5) 8(1.5,1.5) 9(-0.5,1.5)
  silkscreen extent -3.14,-14.04 10.07,2.85
WFBGA-169-14x18x0.8mm [mm]
  round 0.3 smd: A4(1.5,3.5) A6(2.5,3.5) A9(4,3.5) A11(5,3.5) AA1(0,-6.5) AA3(1,-6.5) AA4(1.5,-6.5) AA5(2,-6.5) AA6(2.5,-6.5) AA7(3,-6.5) AA8(3.5,-6.5) AA9(4,-6.5) AA10(4.5,-6.5) AA11(5,-6.5) AA12(5.5,-6.5) AA13(6,-6.5) AA14(6.5,-6.5) AE1(0,-8.5) AE14(6.5,-8.5) AG2(0.5,-9.5) AG13(6,-9.5) AH4(1.5,-10) AH6(2.5,-10) AH9(4,-10) AH11(5,-10) B2(0.5,3) B13(6,3) D1(0,2) D14(6.5,2) H3(1,0) H4(1.5,0) H5(2,0) H7(3,0) H8(3.5,0) H9(4,0) H10(4.5,0) H11(5,0) H12(5.5,0) H13(6,0) H14(6.5,0) J1(0,-0.5) J2(0.5,-0.5) J3(1,-0.5) J4(1.5,-0.5) J5(2,-0.5) J6(2.5,-0.5) J7(3,-0.5) J8(3.5,-0.5) J9(4,-0.5) J10(4.5,-0.5) J11(5,-0.5) J12(5.5,-0.5) J13(6,-0.5) J14(6.5,-0.5) K2(0.5,-1) K4(1.5,-1) K5(2,-1) K6(2.5,-1) K7(3,-1) K8(3.5,-1) K9(4,-1) K10(4.5,-1) K11(5,-1) K12(5.5,-1) K13(6,-1) K14(6.5,-1) L1(0,-1.5) L2(0.5,-1.5) L4(1.5,-1.5) L12(5.5,-1.5) L13(6,-1.5) L14(6.5,-1.5) M1(0,-2) M2(0.5,-2) M3(1,-2) M5(2,-2) M6(2.5,-2) M7(3,-2) M8(3.5,-2) M9(4,-2) M10(4.5,-2) M12(5.5,-2) M13(6,-2) M14(6.5,-2) N1(0,-2.5) N2(0.5,-2.5) N3(1,-2.5) N5(2,-2.5) N10(4.5,-2.5) N12(5.5,-2.5) N13(6,-2.5) N14(6.5,-2.5) P1(0,-3) P2(0.5,-3) P3(1,-3) P5(2,-3) P10(4.5,-3) P12(5.5,-3) P13(6,-3) P14(6.5,-3) R1(0,-3.5) R2(0.5,-3.5) R3(1,-3.5) R5(2,-3.5) R10(4.5,-3.5) R12(5.5,-3.5) R13(6,-3.5) R14(6.5,-3.5) T1(0,-4) T2(0.5,-4) T3(1,-4) T5(2,-4) T10(4.5,-4) T12(5.5,-4) T13(6,-4) T14(6.5,-4) U1(0,-4.5) U2(0.5,-4.5) U3(1,-4.5) U5(2,-4.5) U8(3.5,-4.5) U9(4,-4.5) U10(4.5,-4.5) U12(5.5,-4.5) U13(6,-4.5) U14(6.5,-4.5) V1(0,-5) V2(0.5,-5) V3(1,-5) V12(5.5,-5) V13(6,-5) V14(6.5,-5) W1(0,-5.5) W2(0.5,-5.5) W3(1,-5.5) W4(1.5,-5.5) W5(2,-5.5) W6(2.5,-5.5) W7(3,-5.5) W8(3.5,-5.5) W9(4,-5.5) W10(4.5,-5.5) W11(5,-5.5) W12(5.5,-5.5) W13(6,-5.5) W14(6.5,-5.5) Y1(0,-6) Y2(0.5,-6) Y3(1,-6) Y4(1.5,-6) Y5(2,-6) Y6(2.5,-6) Y7(3,-6) Y8(3.5,-6) Y9(4,-6) Y10(4.5,-6) Y11(5,-6) Y12(5.5,-6) Y13(6,-6) Y14(6.5,-6)
  round 0.27 smd: ""(-2,-9) ""(-2,-8.5) ""(-2,-8) ""(-2,-7.5) ""(-2,-7) ""(-2,-6.5) ""(-2,-6) ""(-2,-0.5) ""(-2,0) ""(-2,0.5) ""(-2,1) ""(-2,1.5) ""(-2,2) ""(-2,2.5) ""(-1.5,-6) ""(-1.5,-9) ""(-1.5,-8.5) ""(-1.5,-8) ""(-1.5,-7.5) ""(-1.5,-7) ""(-1.5,-6.5) ""(-1.5,-0.5) ""(-1.5,0) ""(-1.5,0.5) ""(-1.5,1) ""(-1.5,1.5) ""(-1.5,2) ""(-1.5,2.5) ""(-1,-9) ""(-1,2.5) ""(7.5,-9) ""(7.5,2.5) ""(8,-9) ""(8,-8.5) ""(8,-8) ""(8,-7.5) ""(8,-7) ""(8,-6.5) ""(8,-6) ""(8,-0.5) ""(8,0) ""(8,0.5) ""(8,1) ""(8,1.5) ""(8,2) ""(8,2.5) ""(8.5,-9) ""(8.5,-8.5) ""(8.5,-8) ""(8.5,-7.5) ""(8.5,-7) ""(8.5,-6.5) ""(8.5,-6) ""(8.5,-0.5) ""(8.5,0) ""(8.5,0.5) ""(8.5,1) ""(8.5,1.5) ""(8.5,2) ""(8.5,2.5)
  silkscreen extent -3.76,-12.25 10.25,5.75

## Part data
C1 C2 C7 C13 C14: library part cap, "Capacitor"
C3 C4 C5 C6 C8 C9 C10 C11 C12 C15 C16 C17 C18 C19 C20 C21 C22 C23 C24 C25 C26 C27 C28 C29 C30 C31 C32 C33 C34 C35 C36 C37 C38 C39 C40 C41 C42 C43 C44 C45 C46 C47 C48 C49 C50 C51 C52 C53 C54 C55 C56 C57 C58 C59 C60 C62 C63 C64 C65 C66 C68 C69 C70 C71 C72 C73 C74 C75: library part CAP, "Capacitor"
  C6 C8 C10 C15 C16 C17 C23 C24 C28 C29 C30 C31 C32 C33 C34 C36 C37 C39 C40 C41 C42 C43 C45 C46 C49 C50 C51 C52 C53 C54 C55 C58 C62 C63 C64 C65 C66 C68 C69 C71 C72: 容值=100nF
  C9 C75: 容值=33uF
C61 C67: library part CAPACITOR, "Capacitor"
D1: "Typical RED GaAs LED", PackageDescription="LED; 2 Leads"
D2 D4: library part "0805 蓝灯", "发光二极管"
D3: library part "0805 翠绿", "发光二极管"
D5: library part "0805 黄灯", "发光二极管"
F1 F2: library part FUSE1, "Fuse"
  F1: 额定电流=1A
J1: library part CON2, "Connector"
J3 J4 J6: "Connector"
J5: library part USB-AF3.0-90卷
L1 L2 L3 L4 L7: library part INDUCTOR
  L1: 感值=3.3uH
  L2 L4: =磁珠
L5 L6: library part Inductor, "Inductor"
P3 P4: "Header, 2-Pin", Publisher="Altium Limited"
  P3: LatestRevisionDate=17-Jul-2002, LatestRevisionNote="Re-released for DXP Platform."
P5: "Header, 5-Pin", Publisher="Altium Limited"
P6: "Header, 11-Pin, Dual row", LatestRevisionDate=17-Jul-2002, LatestRevisionNote="Re-released for DXP Platform.", Publisher="Altium Limited"
R1 R2 R3 R4 R5 R6 R7 R8 R9 R10 R11 R12 R13 R15 R16 R17 R18 R19 R23 R24 R27 R28 R29 R30 R31 R32 R33 R34 R35 R36 R37 R38 R39 R40 R43 R44 R45 R46 R47 R48 R49 R50 R52 R53 R54 R55 R56 R57 R58 R59 R60 R61 R62 R63 R64 R65 R66 R67 R68 R69 R70 R71 R72 R73 R81 R82 R83 R84 R88: library part Res
  R35: 阻值=4.7K
R14: library part Res1, "Resistor"
R20 R21 R22 R25 R26 R85 R86 R87: library part Res2, "Resistor", PackageDescription="Axial Device, Thru-Hole; 2 Leads; 0.4 in Pin Spacing"
R41 R42 R51 R76 R80: library part R-8P4R, "贴片网络排阻"
R74 R75 R77 R78 R79: library part R
S1 S2: "Switch"
S3: "SPDT Subminiature Toggle Switch, Right Angle Mounting, Vertical Actuation"
tp1 tp2: "测试点"
U4: "32bit RISC-V MCU with USB 3.0 SS/HS & quad UART & AES & ETH & DVP"
U5: library part RTL8211FS(I), "千兆以太网物理层芯片"
U8: library part Pro89C.tmp_25F512_2
X1: library part 晶体
X2: library part XTAL-2P, "2脚无源脚晶振", BOM名称=2脚无源脚晶振, 学习资源=www.ooocke.com, 版权归属=源创客

## Free pads (board coordinates)
  round 137.8 hole 118.11: 0(144.36,143.12) 0(144.36,3793.89) 0(3792.65,3793.89) 0(3792.65,143.12)
  round 32 hole 20: ""(104.69,1361.92) ""(104.69,1408.95) ""(104.69,1455.97) ""(104.69,1502.99) ""(104.69,1550.01) ""(154.01,1361.92) ""(154.01,1408.95) ""(154.01,1455.97) ""(154.01,1502.99) ""(154.01,1550.01) ""(203.33,1361.92) ""(203.33,1408.95) ""(203.33,1455.97) ""(203.33,1502.99) ""(203.33,1550.01) ""(252.64,1361.92) ""(252.64,1408.95) ""(252.64,1455.97) ""(252.64,1502.99) ""(252.64,1550.01)
  rect 220x260 smd far side: ""(186.59,1454.12)
  oct 180x180 hole 140: ""(3119.01,3813.24)

## Via types
v1: diameter 17.72, hole 7.87, Top Layer to Bottom Layer, tented both sides, 564 vias
v2: diameter 24, hole 12, Top Layer to Bottom Layer, tented both sides, 371 vias
v3: diameter 28, hole 16, Top Layer to Bottom Layer, tented both sides, 64 vias
v4: diameter 26, hole 14, Top Layer to Bottom Layer, tented both sides, 2 vias
v5: diameter 19.68, hole 10, Top Layer to Bottom Layer, tented both sides, 1 vias
v6: diameter 20, hole 10, Top Layer to Bottom Layer, tented both sides, 1 vias
v7: diameter 32, hole 18, Top Layer to Bottom Layer, tented both sides, 1 vias
v8: diameter 17.72, hole 12, Top Layer to Bottom Layer, tented both sides, 1 vias

## Nets (pads, with @x,y where several pads share a name; then routed paths per layer and width w, separated by ;. In a path a pad name is that pad's centre, name@x,y a point inside that pad or via, vN(x,y) a via of type N, cw(c..) or ccw(c..) an arc to the next point about the centre after c; other vN are vias at no path point)
1V2: C14.2 C36.2 C38.2 C49.2 C50.2 L4.2 U4.6 U4.9 U4.63 | length 1926.6
  Top Layer w6: 1991.15,1500.63 1991.15,1560.14 U4.6@1991.35,1560.34 1991.35,1510.76 ; U4.9@2038.15,1559.9 U4.9@2038.59,1560.34 2038.59,1550.01 ccw(c2079.67,1550.01) v6@2050.63,1520.96 ; 1991.35,1510.76 ccw(c2022.85,1510.76) v2(2000.58,1488.49) 1991.35,1497.71 1991.35,1510.76
  Top Layer w6.07: v3(1793,1686) ccw(c1831.92,1724.92) 1831.92,1669.88 U4.63@1880.41,1669.88
  Top Layer w30: L4.2@1211.8,1079.72 1220.56,1088.48 ccw(c1149.85,1159.19) 1249.85,1159.19 C14.2@1249.85,1181.08 1519.59,1181.08 1546.13,1181.08 ccw(c1546.13,1181.85) v3(1546.9,1181.85)
  Layer 2 w20: v3(1519.59,1181.85) v3(1546.9,1181.85) 1570.22,1181.85 ccw(c1570.22,1271.76) 1633.8,1208.18 1763.71,1338.09 ccw(c1693,1408.8) 1793,1408.8 1793,1480.29 ; 1793,1571.94 1793,1564.52 ; v3(1793,1686) 1793,1564.52 ; v2(2000.58,1488.49) 1990.41,1498.65 ccw(c1919.7,1427.94) 1919.7,1527.94 1840.65,1527.94 ; 1793,1480.29 cw(c1840.65,1480.29) 1840.65,1527.94 ; 1793,1480.29 1793,1527.94 ; 1793,1527.94 1793,1564.52 ; 1793,1527.94 1829.58,1527.94 ; 1793,1564.52 ccw(c1829.58,1564.52) 1829.58,1527.94 ; 1829.58,1527.94 1840.65,1527.94
  Layer 2 w30: v2(2000.58,1488.49) ccw(c2000.58,1518.85) 2022.05,1497.38 v6(2049.13,1524.46)
  Bottom Layer w20: C36.2@1814.62,1691.49 C38.2@1814.62,1755.37
  Bottom Layer w30: C49.2@1999.49,1518.66 1999.49,1491.11 ccw(c2003.2,1491.11) v2(2000.58,1488.49) ; v6(2049.13,1524.46) 2054.09,1529.42 ccw(c2020.25,1563.26) C50.2@2068.11,1563.26
2V5: C7.2 C8.2 R84.1 U2.2 | length 737.7
  Top Layer w30: U2.2@398.07,1455.16 544.41,1455.16 cw(c544.41,1422.82) C8.2@567.28,1445.69 567.28,1387.32 ccw(c622.64,1387.32) C7.2@583.5,1348.18 583.5,1309.09 ccw(c616.29,1309.09) 593.1,1285.9 ccw(c644.76,1337.57) 644.76,1264.5 705.85,1264.5 ccw(c705.85,1364.5) 776.56,1293.79 889.39,1406.62 ccw(c850.99,1445.02) R84.1@905.3,1445.02
3V3: C2.2 C65.2 C67.1 C68.1 C69.1 J4.3 JP1.2 L2.2 P3.1 P5.5 R2.2 R9.1 R13.1 R17.1 R52.2 R64.2 R65.2 R81.2 R82.2 R83.2 R85.1 U7.M6 U7.N5 U7.T10 U7.U9 U8.3 U8.7 U8.8 | length 16449.5
  Top Layer w6: v1(3481.78,3005.34) cw(c3486.82,3002.07) 3486.82,3008.07 3491.86,3008.07 3499.89,3016.11 U7.N5@3501.47,3016.11 3502.58,3017.22 3512.48,3017.22 3520.04,3024.78 3520.04,3034.68 U7.M6@3521.15,3035.79 ; U7.U9@3580.21,2937.37 v2@3580.21,2948.61 ; v2@3580.21,2948.61 cw(c3589,2948.61) v2(3582.78,2954.83)
  Top Layer w30: v3(428.7,366.52) cw(c427.24,367.97) v3@427.24,365.91 ; L2.2@687.96,1079.72 ccw(c646.67,1121.01) 705.06,1121.01 C2.2@705.06,1181.08 ; R85.1@905.3,1307.5 828.43,1230.63 ; v3(2330.32,3210.65) ccw(c2336.04,3216.36) 2336.04,3208.28 R9.1@2403.9,3208.28 ; v3(2365.45,3210.79) 2397.84,3210.79 cw(c2397.84,3202.22) R9.1@2403.9,3208.28 ; R17.1@2403.9,3137.48 R9.1@2403.9,3208.28 ; R81.2@2557.01,885.2 R83.2@2775.75,885.2 v3@2775.75,817.11 ; v3(2956.04,712.11) ccw(c2957.33,713.39) 2957.33,711.58 U8.3@3035.36,711.58 3150.75,711.58 ccw(c3150.75,773.38) 3194.46,729.68 3231.96,767.18 cw(c3235.23,763.92) 3235.23,768.54 ; R64.2@3125.26,1248.07 R65.2@3125.26,1185.93 3072.71,1185.93 ccw(c3072.71,1143.91) 3042.99,1173.62 ccw(c3088.65,1127.97) 3024.08,1127.97 3024.08,1036.5 ccw(c3114.78,1036.5) 3050.65,972.37 ccw(c3090.21,1011.93) 3090.21,955.98 3279.7,955.98 ; U8.7@3305.36,761.58 3249.54,761.58 cw(c3249.54,779.32) 3236.99,766.77 3235.23,768.54 ; R52.2@3447.84,897.08 3447.84,917.53 ; JP1.2@3612.66,509.23 ccw(c3695.27,509.23) 3636.86,450.82 3645.59,442.08 ccw(c3678.06,474.56) 3678.06,428.64 3730.51,428.64 ccw(c3730.51,515.9) 3792.2,454.19 3793.02,455 ccw(c3722.31,525.71) 3822.31,525.71 3822.31,875.62 ccw(c3722.31,875.62) 3793.02,946.33 J4.3@3713.66,1025.68 3713.66,1008.86 cw(c3652.76,1008.86) 3695.83,965.79 cw(c3672.13,989.49) 3672.13,955.98 3472.25,955.98 ; v3@427.24,365.92 ccw(c425.11,368.05) 428.13,368.05 v3(428.13,396.51) cw(c420.76,396.51) 425.98,391.32 R2.2@400.58,365.91 v3@427.24,365.91 ; C2.2@705.06,1181.08 cw(c725.32,1181.08) 725.32,1201.34 v3(751.84,1201.34) 757.72,1201.34 ccw(c757.72,1301.34) 828.43,1230.63 ; C2.2@705.06,1181.08 ccw(c736.34,1212.36) 736.34,1168.12 v3(751.84,1168.12) ccw(c751.84,1202.09) 775.87,1178.07 808.16,1210.36 ; C2.2@705.06,1181.08 737.45,1181.08 ccw(c737.45,1281.08) 751.84,1182.12 ccw(c737.45,1281.08) 808.16,1210.36 ; 808.16,1210.36 828.43,1230.63 ; 3235.23,768.54 cw(c3251.27,784.58) 3228.58,784.58 cw(c3256.05,784.58) 3236.63,804 3238.48,805.85 cw(c3252.31,792.01) 3252.31,811.58 U8.8@3305.36,811.58 3305.36,862.12 cw(c3352.04,862.12) C65.2@3319.03,895.12 3319.03,916.64 ; 3279.7,955.98 cw(c3279.7,916.64) 3319.03,916.64 ; 3279.7,955.98 3346.53,955.98 ; 3319.03,916.64 3319.03,925.21 cw(c3352.13,925.21) 3328.73,948.61 cw(c3346.53,930.81) 3346.53,955.98 ; 3346.53,955.98 3409.39,955.98 ; 3409.39,955.98 cw(c3409.39,917.53) 3447.84,917.53 ; 3409.39,955.98 3472.25,955.98 ; 3447.84,917.53 3447.84,931.57 ; 3447.84,931.57 cw(c3472.25,931.57) 3472.25,955.98 ; 3447.84,931.57 3447.84,933.16 cw(c3469.54,933.16) 3454.2,948.5 cw(c3472.25,930.45) 3472.25,955.98
  Layer 2 w30: v3@738.25,1168.52 534.82,965.09 ccw(c605.53,894.38) 505.53,894.38 505.53,880.38 ; v3(2330.32,3210.65) 2330.47,3210.79 v3(2365.45,3210.79) 2496.32,3210.79 ccw(c2496.32,3310.79) 2567.03,3240.08 2739.49,3412.54 cw(c2810.2,3341.82) 2810.2,3441.82 3540.1,3441.82 cw(c3540.1,3341.82) 3610.81,3412.54 3648.75,3374.6 cw(c3578.04,3303.89) 3678.04,3303.89 3678.04,3062.14 cw(c3578.04,3062.14) 3648.75,2991.43 3632.91,2975.6 cw(c3582.78,3025.73) v2(3582.78,2954.83) ; 2878.79,790.77 ccw(c2815.19,727.17) 2815.19,817.11 ; v3(2956.04,712.11) 2920.83,747.33 cw(c2923.23,749.73) 2919.83,749.73 ; JP1.2@3612.66,509.23 3612.66,162.58 cw(c3548.79,162.58) 3593.95,117.41 3588.94,112.4 cw(c3518.23,183.11) 3518.23,83.11 P5.5@2985.09,83.11 2985.09,108.35 ccw(c2949.52,108.35) 2974.67,133.5 2968.33,139.84 ccw(c2897.62,69.13) 2897.62,169.13 2465.66,169.13 ccw(c2465.66,69.13) 2394.95,139.84 2340.91,85.8 cw(c2270.2,156.51) 2270.2,56.51 635.13,56.51 cw(c635.13,156.51) 564.41,85.8 456.15,194.06 cw(c523.81,261.72) 428.13,261.72 428.13,324.53 ; 428.13,324.53 cw(c528.13,324.53) 457.42,395.24 ; 428.13,324.53 v3@428.13,367.89 ; v3@428.13,367.89 ccw(c430.07,367.89) v3(428.7,366.52) 457.42,395.24 ; v3@428.13,367.89 v3(428.13,396.51) 476.24,444.63 ccw(c405.53,515.34) 505.53,515.34 ; 457.42,395.24 476.24,414.06 ccw(c405.53,484.77) 505.53,484.77 505.53,515.34 ; 505.53,515.34 505.53,880.38 ; 505.53,880.38 cw(c605.53,880.38) 534.82,951.09 v3(751.84,1168.12) 751.84,1182.12 ; v3@738.3,1168.57 ccw(c705.44,1201.34) v3(751.84,1201.34) ; v3@738.3,1168.57 ccw(c705.44,1201.34) v3(751.84,1201.34) ; v3@738.3,1168.57 751.84,1182.12 ; 751.84,1182.12 v3(751.84,1201.34) ; 2776,833.06 2776.68,833.06 cw(c2776.68,778.6) 2815.19,817.11 ; 2776,833.06 2776,817.23 v3(2775.88,817.11) 2815.19,817.11 ; 2776,833.06 v3(2776,848.9) 2779.24,848.9 cw(c2779.24,748.9) 2849.95,819.61 2919.83,749.73 ; 2919.83,749.73 2940.42,729.13 ccw(c2983.39,772.1) v3@2958.19,716.81 ; v3@2958.19,716.81 ccw(c2971.4,730.02) 2971.4,711.34 v3(2983.39,711.34) cw(c2983.39,772.1) v3@2958.19,716.81
  Bottom Layer w15: C67.1@3486.52,3021.86 3486.52,3064.43 cw(c3512.04,3064.43) 3494,3082.48 cw(c3505.7,3070.78) 3505.7,3087.32 3514.38,3087.32 cw(c3514.38,3061.32) 3532.77,3079.71 3538.02,3074.45 cw(c3526.21,3062.63) 3542.92,3062.63 3542.92,3059.96 ccw(c3566.55,3059.96) 3549.84,3043.25 3571.45,3021.64 ccw(c3611.87,3062.07) C69.1@3611.87,3004.9
  Bottom Layer w30: v3(751.84,1168.12) v3(751.84,1201.34) 751.84,1297.11 cw(c851.84,1297.11) 781.13,1367.82 814.68,1401.37 ccw(c743.97,1472.08) 843.97,1472.08 P3.1@843.97,1597.92 821.06,1597.92 cw(c821.06,1679.02) 763.71,1621.67 cw(c792.35,1650.31) 751.84,1650.31 751.84,1702.51 ccw(c651.84,1702.51) 722.55,1773.22 526.23,1969.55 cw(c596.94,2040.26) 496.94,2040.26 496.94,2224.13 cw(c596.94,2224.13) 526.23,2294.84 704.05,2472.66 cw(c774.76,2401.95) 774.76,2501.95 793.96,2501.95 ccw(c793.96,2601.95) 864.67,2531.24 920.51,2587.08 ccw(c849.8,2657.79) 949.8,2657.79 R13.1@949.8,2674.67 1016.51,2674.67 cw(c1016.51,2574.67) 1087.22,2645.38 1106.42,2626.18 ccw(c1171.66,2691.42) 1171.66,2599.16 1427.09,2599.16 ccw(c1427.09,2699.16) 1497.8,2628.45 1530.92,2661.56 ccw(c1460.21,2732.27) 1560.21,2732.27 1560.21,3006.08 cw(c1660.21,3006.08) 1589.5,3076.79 1838.81,3326.1 cw(c1909.52,3255.39) 1909.52,3355.39 2277.01,3355.39 cw(c2277.01,3270.61) 2336.96,3330.56 cw(c2268.17,3261.77) 2365.45,3261.77 ; v2(3582.78,2954.83) 3613.39,2954.83 ccw(c3613.39,2961.21) C68.1@3617.9,2956.7 cw(c3632.46,2971.26) 3611.87,2971.26 C69.1@3611.87,3004.9 ; 2365.45,3261.77 cw(c2326.82,3261.77) 2354.13,3234.46 v3(2330.32,3210.65) 2365.3,3210.65 v3(2365.45,3210.79) 2365.45,3261.77
3X1-IN: C48.2 U4.68 X1.1 | length 353.8
  Top Layer w6.07: C48.2@1698.26,1317 ccw(c1678.14,1337.12) 1706.6,1337.12 X1.1@1706.6,1402.13 1754.91,1450.44 ccw(c1731.17,1474.18) 1764.74,1474.18 cw(c1812.51,1474.18) 1778.73,1507.95 1848.84,1578.06 cw(c1880.41,1546.48) U4.68@1880.41,1591.14
3X1-OUT: C47.1 U4.67 X1.3 | length 363.1
  Top Layer w6.07: C47.1@1558.97,1474.18 cw(c1603.64,1429.51) 1603.64,1492.68 X1.3@1631.8,1492.68 1668.59,1529.48 cw(c1722.97,1475.1) 1722.97,1552 1753.22,1552 ccw(c1753.22,1652) 1823.93,1581.29 1828.94,1586.3 cw(c1878.64,1536.59) 1878.64,1606.89 U4.67@1880.41,1606.89
5V: C3.2 C5.2 C6.2 C11.2 F1.2 J4.1 R12.1 U1.1 U1.4 U2.3 U3(NC).1 U3(NC).4 | length 9657.1
  Top Layer w30: F1.2@190.92,1235.6 219.03,1207.5 cw(c148.32,1136.78) C3.2@248.32,1136.78 ; v3(313.43,209.71) 368,155.15 368.27,155.15 ; v3@338.44,184.98 368.27,155.15 ; U2.3@398.07,1541.16 465.13,1541.16 cw(c465.13,1475.33) 492.72,1535.1 ; U1.4@407.67,852.63 407.67,833.28 cw(c373.53,833.28) 397.67,809.13 394.81,806.27 cw(c368.36,832.71) 368.36,795.32 366.07,795.32 ccw(c366.07,762.44) 342.83,785.69 ; 934.8,852.58 cw(c862.54,852.58) 913.63,801.48 cw(c901.43,813.69) 901.43,796.43 891.05,796.43 ccw(c891.05,765.5) 869.19,787.38 864.76,782.94 ccw(c876.26,771.44) 860,771.44 860,742.39 786.07,742.39 cw(c786.07,785.48) C11.2@755.6,755.01 665.33,664.74 cw(c594.62,735.45) 594.62,635.45 400.69,635.45 cw(c400.69,704.73) 351.7,655.74 cw(c397.17,701.21) 332.87,701.21 U1.1@332.87,742.39 ; v3(3050.32,472.54) 3050.32,492.23 ccw(c3036.78,492.23) v3(3046.36,501.81) 3046.36,308.56 cw(c2946.36,308.56) 3017.07,237.84 2995.64,216.41 cw(c2924.93,287.13) 2924.93,187.13 2536.81,187.13 ccw(c2536.81,87.13) 2466.1,157.84 2429.37,121.11 cw(c2358.66,191.82) 2358.66,91.82 473.02,91.82 cw(c473.02,191.82) 402.31,121.11 368.27,155.15 ; C3.2@248.32,1131.85 ccw(c248.32,1181.23) 283.24,1146.31 v3(288.72,1151.79) v3(288.72,1112.36) 249.61,1112.36 ccw(c249.61,1110.54) 248.32,1111.83 C3.2@248.32,1131.85 ; C3.2@248.32,1131.85 C3.2@248.32,1136.78 ; C3.2@248.32,1136.78 ccw(c269.67,1115.43) 239.47,1115.43 239.47,876.44 ccw(c291.62,876.44) 254.69,839.62 ; 254.69,839.62 ccw(c291.62,876.44) 254.75,839.56 ; 254.69,839.62 cw(c206.75,791.56) 254.75,839.56 ; 254.75,839.56 284.44,809.87 ccw(c342.83,868.25) 308.9,792.98 ; 308.9,792.98 ccw(c342.83,868.25) 342.83,785.69 ; 308.9,792.98 314.05,787.83 cw(c268.6,742.39) U1.1@332.87,742.39 ; U1.1@332.87,742.39 332.87,761.65 cw(c366.87,761.65) 342.83,785.69 ; 492.72,1535.1 ccw(c526.08,1568.46) 508.86,1524.54 ; 492.72,1535.1 cw(c465.13,1475.33) 508.86,1524.54 ; 508.86,1524.54 ccw(c526.08,1568.46) 518.61,1521.88 ccw(c526.08,1568.46) 526.08,1521.29 C6.2@567.28,1521.29 567.28,1574.17 cw(c622.64,1574.17) C5.2@583.5,1613.32 C5.2@578.46,1613.32 ; C5.2@578.46,1613.32 cw(c578.46,1669.8) v3(538.53,1629.86) cw(c536.96,1628.29) 539.17,1628.29 v3(539.17,1599.22) cw(c573.21,1565.19) 573.21,1613.32 C5.2@578.46,1613.32
  Layer 2 w30: v3(337.7,184.24) 259.35,262.6 cw(c330.06,333.31) 230.06,333.31 230.06,1012.28 cw(c330.06,1012.28) 259.35,1082.99 v3(288.72,1112.36) ; v3(538.53,1629.86) 538.53,1443.02 cw(c438.53,1443.02) 509.24,1372.31 316.6,1179.68 ; v3(3046.36,501.81) v3@3050.32,505.78 ; J4.1@3513.66,1025.68 3490.67,1002.69 ccw(c3561.38,931.98) 3461.38,931.98 3461.38,679.35 cw(c3361.38,679.35) 3432.09,608.64 3388.18,564.73 cw(c3317.47,635.44) 3317.47,535.44 3137.14,535.44 ; v3(288.72,1112.36) cw(c383.92,1112.36) 316.57,1179.64 ; v3(288.72,1112.36) v3(288.72,1151.79) 316.57,1179.64 ; v3@3050.32,505.78 3050.7,506.15 cw(c3121.41,435.44) 3083.12,527.82 cw(c3121.41,435.44) 3121.41,535.44 3137.14,535.44 ; v3@3050.32,505.78 v3(3050.32,472.54) 3096.31,518.53 cw(c3137.14,477.69) 3137.14,535.44
  Bottom Layer w30: 307.01,1869.07 307.01,1872.81 ; 307.01,1897.5 307.01,1872.81 ; R12.1@855.52,2663.68 R12.1@855.52,2674.67 802.59,2621.75 cw(c731.88,2692.46) 731.88,2592.46 443.06,2592.46 ccw(c443.06,2533.01) 401.03,2575.05 336.3,2510.31 ccw(c407.01,2439.6) 307.01,2439.6 307.01,1872.81 ; 307.01,1872.81 ccw(c407.01,1872.81) 336.3,1802.1 487.33,1651.07 ; 487.33,1651.07 ccw(c538.53,1702.26) v3(538.53,1629.86) 538.53,1600.79 ccw(c540.74,1600.79) v3(539.17,1599.22) 487.33,1651.07
AVDD10: C41.2 C42.2 C43.2 R54.2 U5.4 U5.9 U5.47 | length 2134.4
  Top Layer w6: v1@1877.48,2381.42 U5.9@1919.13,2381.42 ; v5(1877.48,2460.36) 1877.68,2460.16 U5.4@1919.13,2460.16
  Top Layer w8: v3@1886.66,2591.64 1893.18,2598.15 cw(c1913.61,2577.72) 1913.61,2606.61 1932.42,2606.61 cw(c1932.42,2571.53) 1957.23,2596.34 cw(c1935.17,2574.28) 1966.37,2574.28 U5.47@1966.37,2538.9
  Top Layer w30: v3(2516.69,2522.02) v3@2516.92,2521.79 ; R54.2@2688.84,2484.02 2632.97,2484.02 ; v3@2516.92,2521.79 v3(2550.78,2521.79) 2553.78,2521.79 2562.26,2513.31 ccw(c2632.97,2584.02) 2632.97,2484.02 ; v3@2516.92,2521.79 2525.4,2513.31 ccw(c2596.11,2584.02) 2596.11,2484.02 2632.97,2484.02
  Layer 2 w20: 1822.64,2535.71 cw(c1861.34,2535.71) 1833.97,2563.07 1871.26,2600.36 ; 1822.64,2535.71 v3(1807.95,2535.71) cw(c1848.38,2535.71) 1819.79,2564.3 v3(1855.85,2600.36) 1871.26,2600.36 ; 1822.64,2535.71 1837.33,2535.71 cw(c1837.33,2532.29) v3(1839.74,2534.71) cw(c1884.95,2534.71) 1852.98,2566.68 v3(1886.66,2600.36) 1871.26,2600.36
  Layer 2 w30: v3(1886.66,2600.36) 2429.66,2600.36 ; v3@2537.69,2522.02 ccw(c2459.35,2522.02) 2516.53,2575.57 ; 2429.66,2600.36 cw(c2429.66,2504.14) 2497.69,2572.18 cw(c2451.83,2526.32) 2516.69,2526.32 v3(2516.69,2522.02) 2516.92,2521.79 v3(2550.78,2521.79) ccw(c2503.65,2521.79) 2536.98,2555.11 2516.53,2575.57 ; 2429.66,2600.36 2459.35,2600.36 cw(c2459.35,2522.02) 2516.53,2575.57
  Bottom Layer w20: v3(1855.85,2600.36) v3(1886.66,2600.36) ; v1@1877.48,2381.68 cw(c1877.48,2448.09) 1830.52,2401.13 C42.2@1830.37,2401.28 C43.2@1830.37,2467.37 ; v5(1877.48,2460.36) 1847.3,2460.36 cw(c1847.3,2484.29) C43.2@1830.37,2467.37 ; C43.2@1830.37,2467.37 1830.37,2512.09 ; 1830.37,2512.09 ccw(c1827.49,2512.09) 1829.53,2514.13 v3(1807.95,2535.71) ccw(c1810.36,2538.12) 1810.36,2534.71 v3(1839.74,2534.71) ccw(c1862.36,2512.09) 1830.37,2512.09
  Bottom Layer w30: v3(1886.66,2600.36) cw(c1886.66,2586.51) 1896.45,2596.3 C41.2@1910.29,2582.46
  other v1: 1877.48,2380.68
AVDD33: C15.2 C16.2 R9.2 R10.1 U5.1 U5.12 | length 2190.9
  Top Layer w6: v4(1882.06,2522.15) ccw(c1917.67,2557.76) 1917.67,2507.41 U5.1@1919.13,2507.41
  Top Layer w8: v2(1830.46,2307.55) ccw(c1830.46,2345.89) 1857.57,2318.78 1863.2,2324.41 cw(c1886.79,2300.81) 1886.79,2334.18 U5.12@1919.13,2334.18
  Top Layer w20: 2422.47,3275.57 2367.83,3275.57 ; 2456.64,3267.71 ccw(c2437.66,3248.7) 2437.66,3275.57 2367.83,3275.57 ; 2456.66,3267.7 cw(c2437.66,3248.7) 2464.53,3248.7 R9.2@2464.53,3208.28 R10.1@2533.95,3208.28 ; 2367.83,3275.57 cw(c2367.83,3374.24) v3(2298.06,3304.47) 2306.29,3296.23 cw(c2285.63,3275.57) v3(2314.86,3275.57) 2367.83,3275.57
  Bottom Layer w20: v2(1830.46,2307.55) 1830.37,2307.64 C16.2@1830.37,2335.2 1877.6,2335.2 ccw(c1877.6,2373.89) 1904.96,2346.53 ccw(c1872.53,2378.96) 1918.4,2378.96 1918.4,2496.2 ccw(c1890.72,2496.2) C15.2@1910.29,2515.77 1897.48,2515.77 cw(c1897.48,2537.57) v4(1882.06,2522.15) 1882.06,2530.38 ccw(c1847.34,2530.38) 1871.89,2554.93 1866.79,2560.03 ccw(c1850.57,2543.81) 1850.57,2566.75 cw(c1850.57,2618.23) 1814.17,2581.83 1805.37,2590.62 cw(c1838.2,2623.45) 1791.78,2623.45 1791.78,2799.72 cw(c1891.78,2799.72) 1821.07,2870.43 2196.91,3246.28 ; 2257.51,3287.29 2298.19,3287.29 cw(c2298.19,3275.37) 2306.59,3283.83 cw(c2327.29,3304.47) v3(2298.06,3304.47) 2296.52,3304.47 ccw(c2296.52,3204.47) 2238.71,3286.06 ; v3@2306.62,3283.8 v3(2314.86,3275.57) ; v3@2316.86,3275.57 v3(2314.86,3275.57) ; 2196.91,3246.28 cw(c2267.62,3175.57) 2267.62,3275.57 ; 2196.91,3246.28 2225.81,3275.18 cw(c2296.52,3204.47) 2238.71,3286.06 ; 2238.71,3286.06 ccw(c2264.06,3311.41) 2264.06,3275.57 2267.62,3275.57 ; 2267.62,3275.57 v3(2314.86,3275.57)
CK125M: R62.1 U5.44 | length 438.4
  Top Layer w6: R62.1@1833.08,2915.44 1850.71,2897.82 cw(c1779.99,2827.1) 1879.99,2827.1 1879.99,2781.41 ccw(c1979.99,2781.41) 1909.28,2710.7 1984.32,2635.66 cw(c1913.61,2564.95) 2013.61,2564.95 U5.44@2013.61,2538.9
CLK_1: R34.1 R41.8 R78.2 U4.31 | length 2702.9
  Top Layer w6: U4.31@2196.78,1795.86 2254.11,1795.86 ccw(c2254.11,1895.86) 2288.95,1802.13 ccw(c2254.11,1895.86) 2324.82,1825.15 2327.71,1828.03 cw(c2375.59,1780.15) 2375.59,1847.87 2426.43,1847.87 2426.43,1888.16 cw(c2526.43,1888.16) 2526.43,1988.16 2785.32,1988.16 ccw(c2785.32,2088.16) 2885.32,2088.16 2885.32,2118.59 2885.32,2121.59 ccw(c2879.02,2121.59) 2879.02,2127.89 2872.55,2127.89 cw(c2872.55,2134.19) 2866.25,2134.19 2866.25,2135.59 cw(c2872.55,2135.59) 2872.55,2141.89 2903.88,2141.89 ccw(c2903.88,2148.19) 2910.18,2148.19 2910.18,2149.59 ccw(c2903.88,2149.59) 2903.88,2155.89 2872.55,2155.89 cw(c2872.55,2162.19) 2866.25,2162.19 2866.25,2163.59 cw(c2872.55,2163.59) 2872.55,2169.89 2903.88,2169.89 ccw(c2903.88,2176.19) 2910.18,2176.19 2910.18,2177.59 ccw(c2903.88,2177.59) 2903.88,2183.89 2872.55,2183.89 cw(c2872.55,2190.19) 2866.25,2190.19 2866.25,2191.59 cw(c2872.55,2191.59) 2872.55,2197.89 2903.88,2197.89 ccw(c2903.88,2204.19) 2910.18,2204.19 2910.18,2205.59 ccw(c2903.88,2205.59) 2903.88,2211.89 2872.55,2211.89 cw(c2872.55,2218.19) 2866.25,2218.19 2866.25,2219.59 cw(c2872.55,2219.59) 2872.55,2225.89 2903.88,2225.89 ccw(c2903.88,2232.19) 2910.18,2232.19 2910.18,2233.59 ccw(c2903.88,2233.59) 2903.88,2239.89 2872.55,2239.89 cw(c2872.55,2246.19) 2866.25,2246.19 2866.25,2247.59 cw(c2872.55,2247.59) 2872.55,2253.89 2903.88,2253.89 ccw(c2903.88,2260.19) 2910.18,2260.19 2910.18,2261.59 ccw(c2903.88,2261.59) 2903.88,2267.89 2872.55,2267.89 cw(c2872.55,2274.19) 2866.25,2274.19 2866.25,2275.59 cw(c2872.55,2275.59) 2872.55,2281.89 2903.88,2281.89 ccw(c2903.88,2288.19) 2910.18,2288.19 2910.18,2289.59 ccw(c2903.88,2289.59) 2903.88,2295.89 2872.55,2295.89 cw(c2872.55,2302.19) 2866.25,2302.19 2866.25,2303.59 cw(c2872.55,2303.59) 2872.55,2309.89 2903.88,2309.89 ccw(c2903.88,2316.19) 2910.18,2316.19 2910.18,2317.59 ccw(c2903.88,2317.59) 2903.88,2323.89 2872.55,2323.89 cw(c2872.55,2330.19) 2866.25,2330.19 2866.25,2331.59 cw(c2872.55,2331.59) 2872.55,2337.89 2903.88,2337.89 ccw(c2903.88,2344.19) 2910.18,2344.19 2910.18,2345.59 ccw(c2903.88,2345.59) 2903.88,2351.89 2872.55,2351.89 cw(c2872.55,2358.19) 2866.25,2358.19 2866.25,2359.59 cw(c2872.55,2359.59) 2872.55,2365.89 2903.88,2365.89 ccw(c2903.88,2372.19) 2910.18,2372.19 2910.18,2373.59 ccw(c2903.88,2373.59) 2903.88,2379.89 2872.55,2379.89 cw(c2872.55,2386.19) 2866.25,2386.19 2866.25,2387.59 cw(c2872.55,2387.59) 2872.55,2393.89 2903.88,2393.89 ccw(c2903.88,2400.19) 2910.18,2400.19 2910.18,2401.59 ccw(c2903.88,2401.59) 2903.88,2407.89 2872.55,2407.89 cw(c2872.55,2414.19) 2866.25,2414.19 2866.25,2415.59 cw(c2872.55,2415.59) 2872.55,2421.89 2903.88,2421.89 ccw(c2903.88,2428.19) 2910.18,2428.19 2910.18,2429.59 ccw(c2903.88,2429.59) 2903.88,2435.89 2872.55,2435.89 cw(c2872.55,2442.19) 2866.25,2442.19 2866.25,2443.59 cw(c2872.55,2443.59) 2872.55,2449.89 2903.88,2449.89 ccw(c2903.88,2456.19) 2910.18,2456.19 2910.18,2457.59 ccw(c2903.88,2457.59) 2903.88,2463.89 2872.55,2463.89 cw(c2872.55,2470.19) 2866.25,2470.19 2866.25,2471.59 cw(c2872.55,2471.59) 2872.55,2477.89 2903.88,2477.89 ccw(c2903.88,2484.19) 2910.18,2484.19 2910.18,2485.59 ccw(c2903.88,2485.59) 2903.88,2491.89 2872.55,2491.89 cw(c2872.55,2498.19) 2866.25,2498.19 2866.25,2499.59 cw(c2872.55,2499.59) 2872.55,2505.89 2903.88,2505.89 ccw(c2903.88,2512.19) 2910.18,2512.19 2910.18,2513.59 ccw(c2903.88,2513.59) 2903.88,2519.89 2872.55,2519.89 cw(c2872.55,2526.19) 2866.25,2526.19 2866.25,2527.59 cw(c2872.55,2527.59) 2872.55,2533.89 2903.88,2533.89 ccw(c2903.88,2540.19) 2910.18,2540.19 2910.18,2541.59 ccw(c2903.88,2541.59) 2903.88,2547.89 2872.55,2547.89 cw(c2872.55,2554.19) 2866.25,2554.19 2866.25,2555.59 cw(c2872.55,2555.59) 2872.55,2561.89 2903.88,2561.89 ccw(c2903.88,2568.19) 2910.18,2568.19 2910.18,2569.59 ccw(c2903.88,2569.59) 2903.88,2575.89 2872.55,2575.89 cw(c2872.55,2582.19) 2866.25,2582.19 2866.25,2583.59 cw(c2872.55,2583.59) 2872.55,2589.89 2879.02,2589.89 ccw(c2879.02,2596.19) 2885.32,2596.19 2885.32,2618.32 R78.2@2885.32,2673.67
  other v2: 2399.96,1845.76
CMD_1: R41.6 R77.2 U4.29 | length 2954.6
  Top Layer w6: U4.29@2196.78,1764.37 2275.73,1764.37 ccw(c2275.73,1820.59) 2315.48,1780.83 ; 2315.5,1780.85 cw(c2331.46,1764.86) 2331.46,1787.45 2361.83,1787.45 cw(c2361.83,1765.31) 2377.49,1780.97 ccw(c2384.42,1787.9) 2384.42,1778.09 v2(2399.74,1778.09) 2893.6,1778.09 ccw(c2893.6,1878.09) 2993.6,1878.09 2993.6,1951.69 2993.6,1954.69 ccw(c2985.6,1954.69) 2985.6,1962.69 2981.6,1962.69 cw(c2981.6,1970.69) 2981.6,1978.69 3005.6,1978.69 ccw(c3005.6,1986.69) 3005.6,1994.69 2981.6,1994.69 cw(c2981.6,2002.69) 2981.6,2010.69 3005.6,2010.69 ccw(c3005.6,2018.69) 3005.6,2026.69 2981.6,2026.69 cw(c2981.6,2034.69) 2981.6,2042.69 3005.6,2042.69 ccw(c3005.6,2050.69) 3005.6,2058.69 2981.6,2058.69 cw(c2981.6,2066.69) 2981.6,2074.69 3005.6,2074.69 ccw(c3005.6,2082.69) 3005.6,2090.69 2981.6,2090.69 cw(c2981.6,2098.69) 2981.6,2106.69 3005.6,2106.69 ccw(c3005.6,2114.69) 3005.6,2122.69 2981.6,2122.69 cw(c2981.6,2130.69) 2981.6,2138.69 3005.6,2138.69 ccw(c3005.6,2146.69) 3005.6,2154.69 2981.6,2154.69 cw(c2981.6,2162.69) 2981.6,2170.69 3005.6,2170.69 ccw(c3005.6,2178.69) 3005.6,2186.69 2981.6,2186.69 cw(c2981.6,2194.69) 2981.6,2202.69 3005.6,2202.69 ccw(c3005.6,2210.69) 3005.6,2218.69 2981.6,2218.69 cw(c2981.6,2226.69) 2981.6,2234.69 3005.6,2234.69 ccw(c3005.6,2242.69) 3005.6,2250.69 2981.6,2250.69 cw(c2981.6,2258.69) 2981.6,2266.69 3005.6,2266.69 ccw(c3005.6,2274.69) 3005.6,2282.69 2981.6,2282.69 cw(c2981.6,2290.69) 2981.6,2298.69 3005.6,2298.69 ccw(c3005.6,2306.69) 3005.6,2314.69 2981.6,2314.69 cw(c2981.6,2322.69) 2981.6,2330.69 3005.6,2330.69 ccw(c3005.6,2338.69) 3005.6,2346.69 2981.6,2346.69 cw(c2981.6,2354.69) 2981.6,2362.69 3005.6,2362.69 ccw(c3005.6,2370.69) 3005.6,2378.69 2981.6,2378.69 cw(c2981.6,2386.69) 2981.6,2394.69 3005.6,2394.69 ccw(c3005.6,2402.69) 3005.6,2410.69 2981.6,2410.69 cw(c2981.6,2418.69) 2981.6,2426.69 3005.6,2426.69 ccw(c3005.6,2434.69) 3005.6,2442.69 2981.6,2442.69 cw(c2981.6,2450.69) 2981.6,2458.69 3005.6,2458.69 ccw(c3005.6,2466.69) 3005.6,2474.69 2981.6,2474.69 cw(c2981.6,2482.69) 2981.6,2490.69 3003,2490.69 ccw(c3003,2498.69) 3003,2506.69 2985.6,2506.69 cw(c2985.6,2514.69) 2985.6,2522.69 ccw(c2985.6,2530.69) 2993.6,2530.69 2993.6,2583.84 R77.2@2993.6,2803.67
  Bottom Layer w6: v2(2399.74,1778.09) cw(c2400.92,1776.92) 2400.92,1778.58 R41.6@2426.52,1778.58